# EAGLE board SparkX_smol_Dynamic_NFC_RFID_Tag-Panel (EAGLE 9.6.2), part 1 of 7
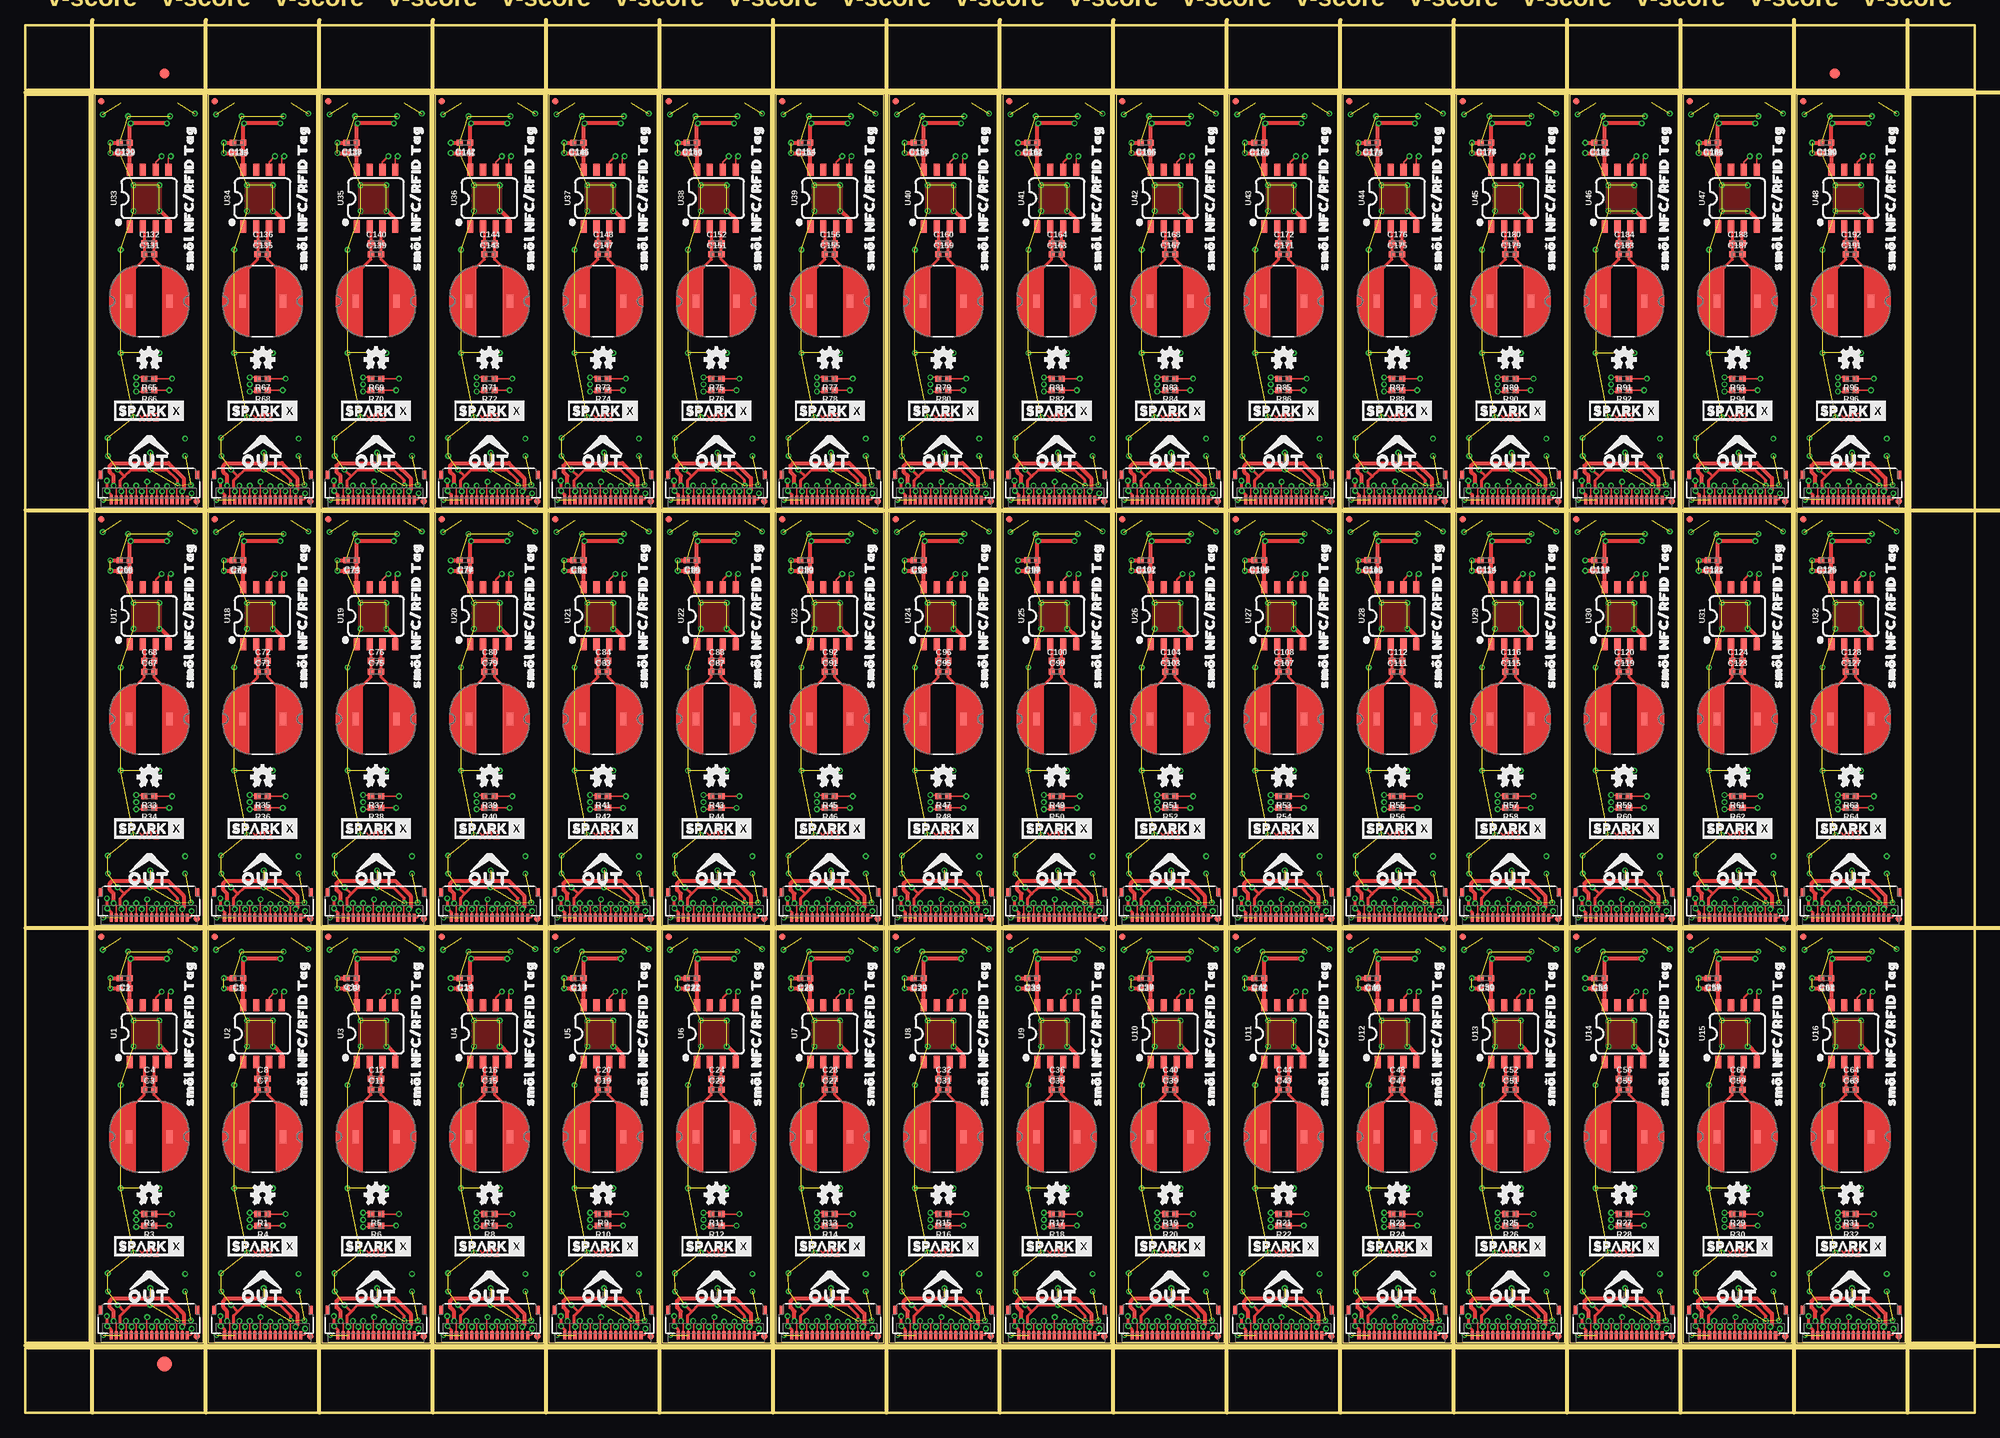
[diagram p0: board, top side]
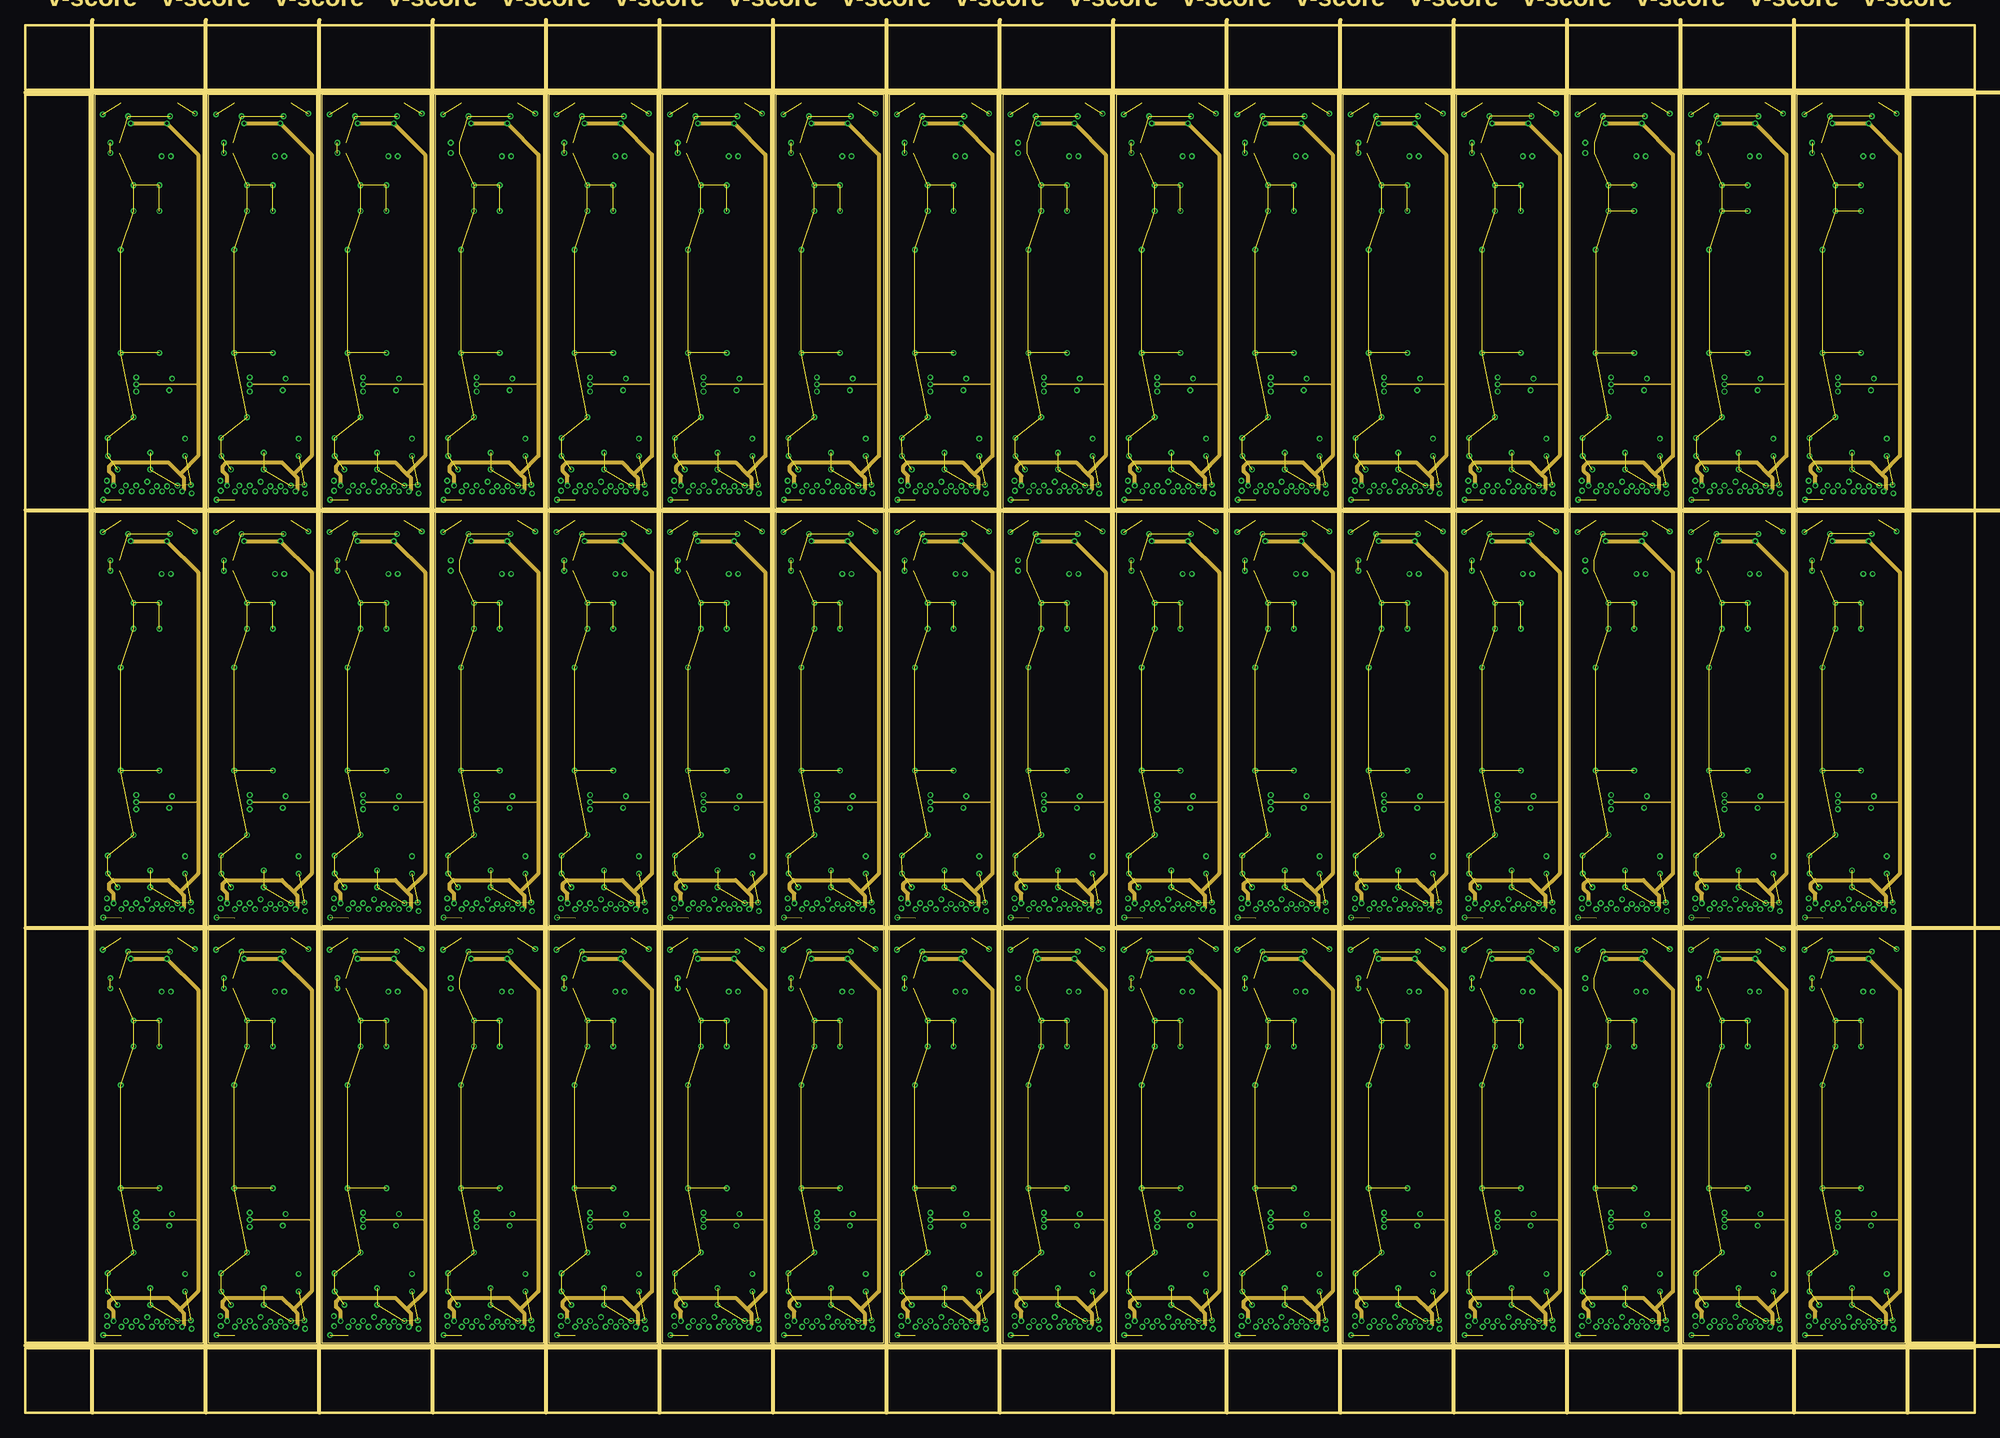
[diagram p1: board, inner layer Route2]
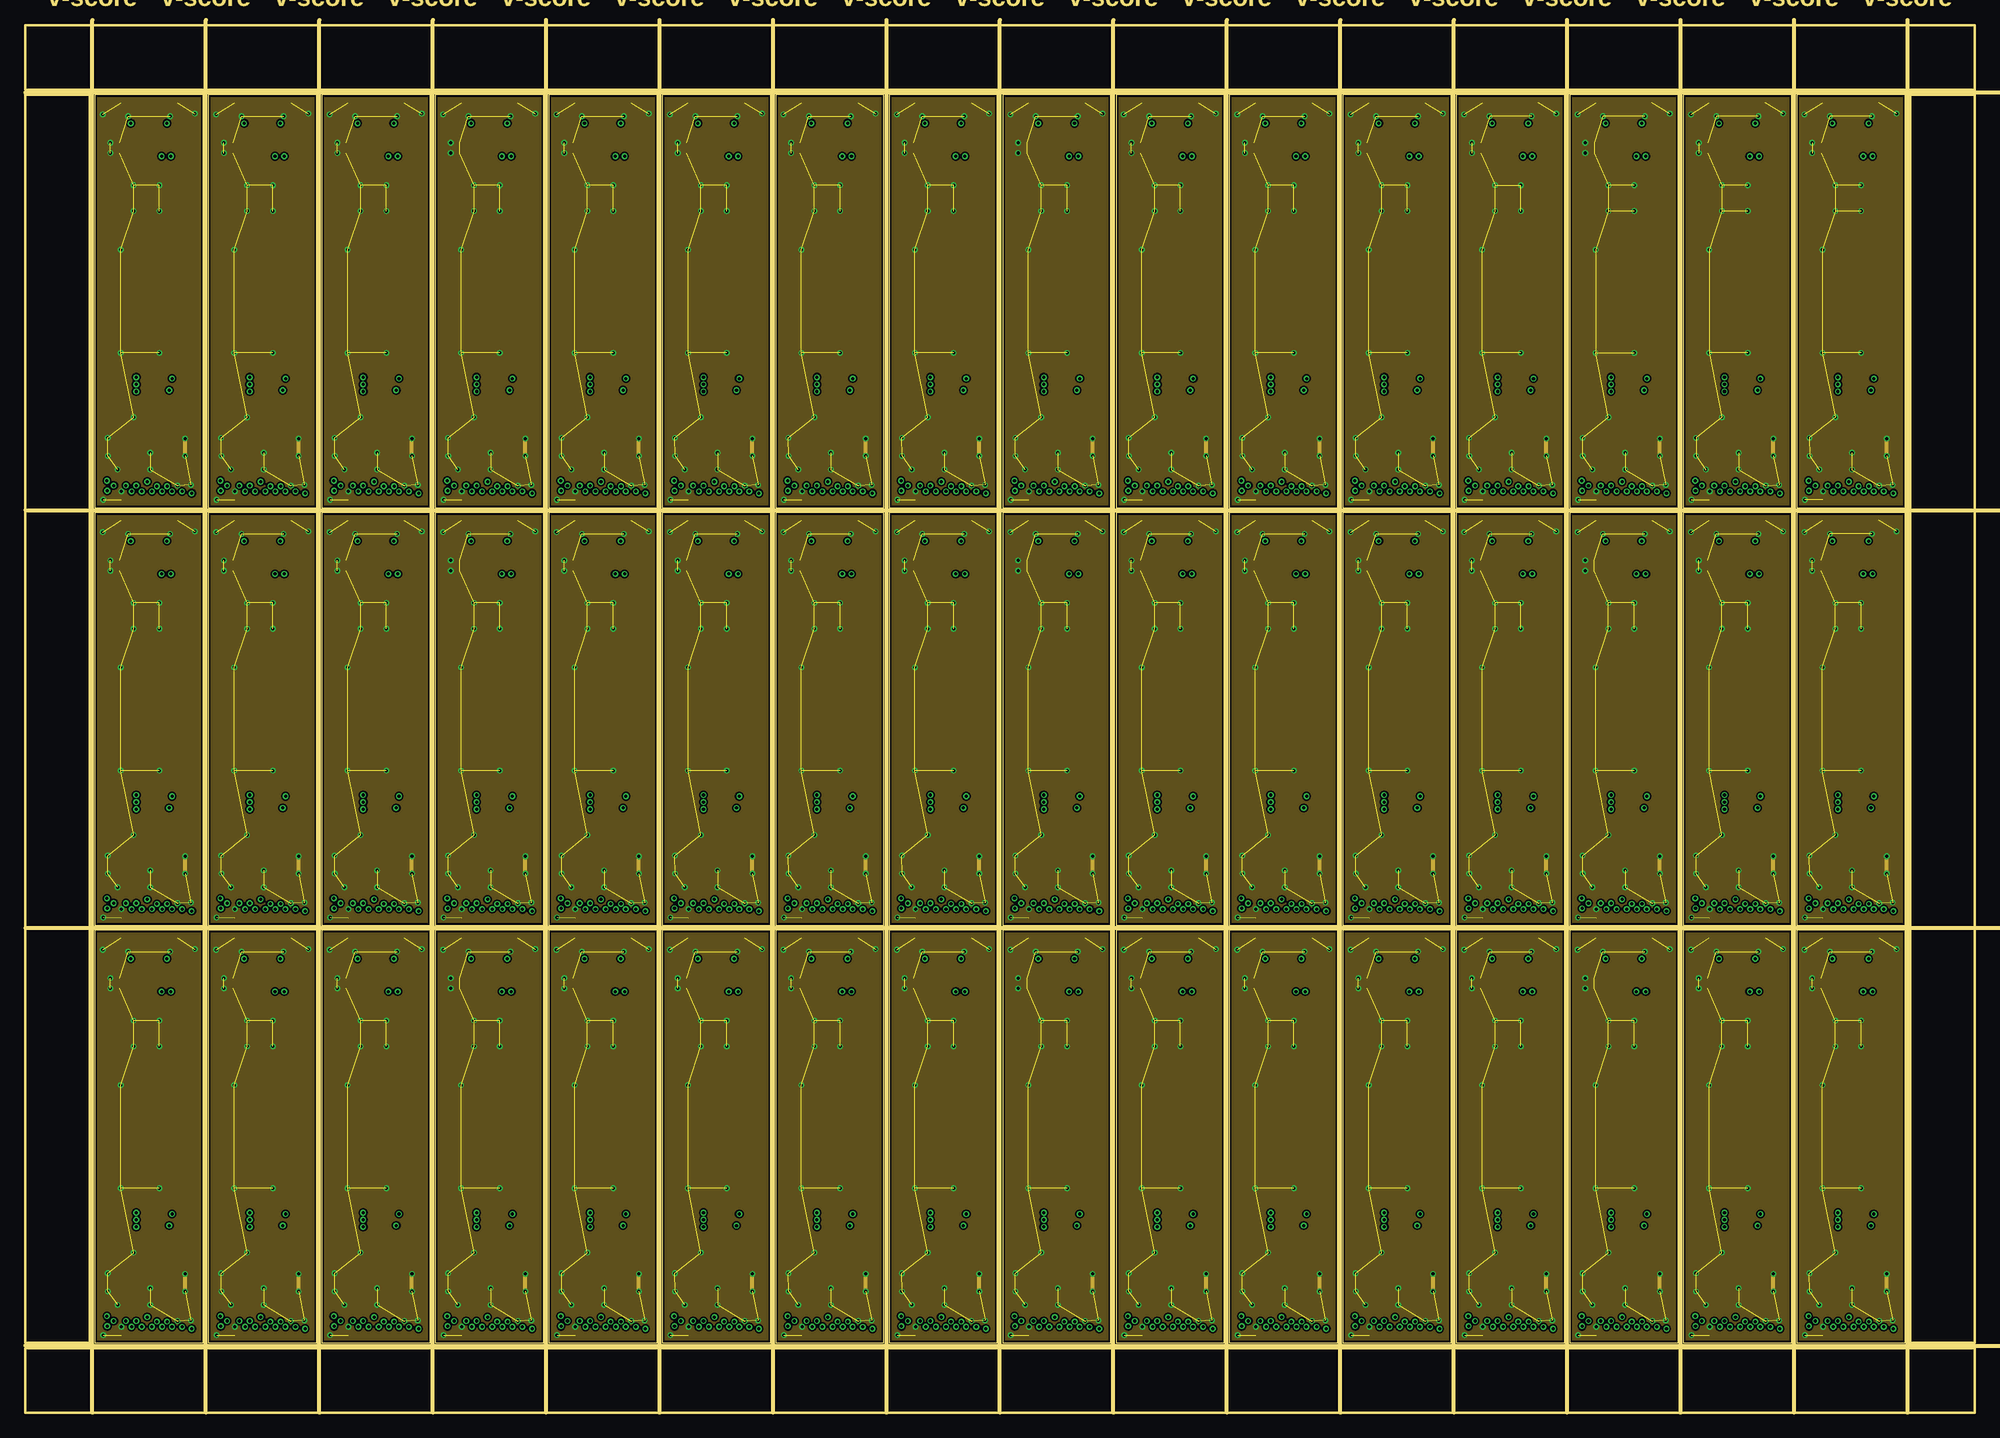
[diagram p2: board, inner layer Route15]
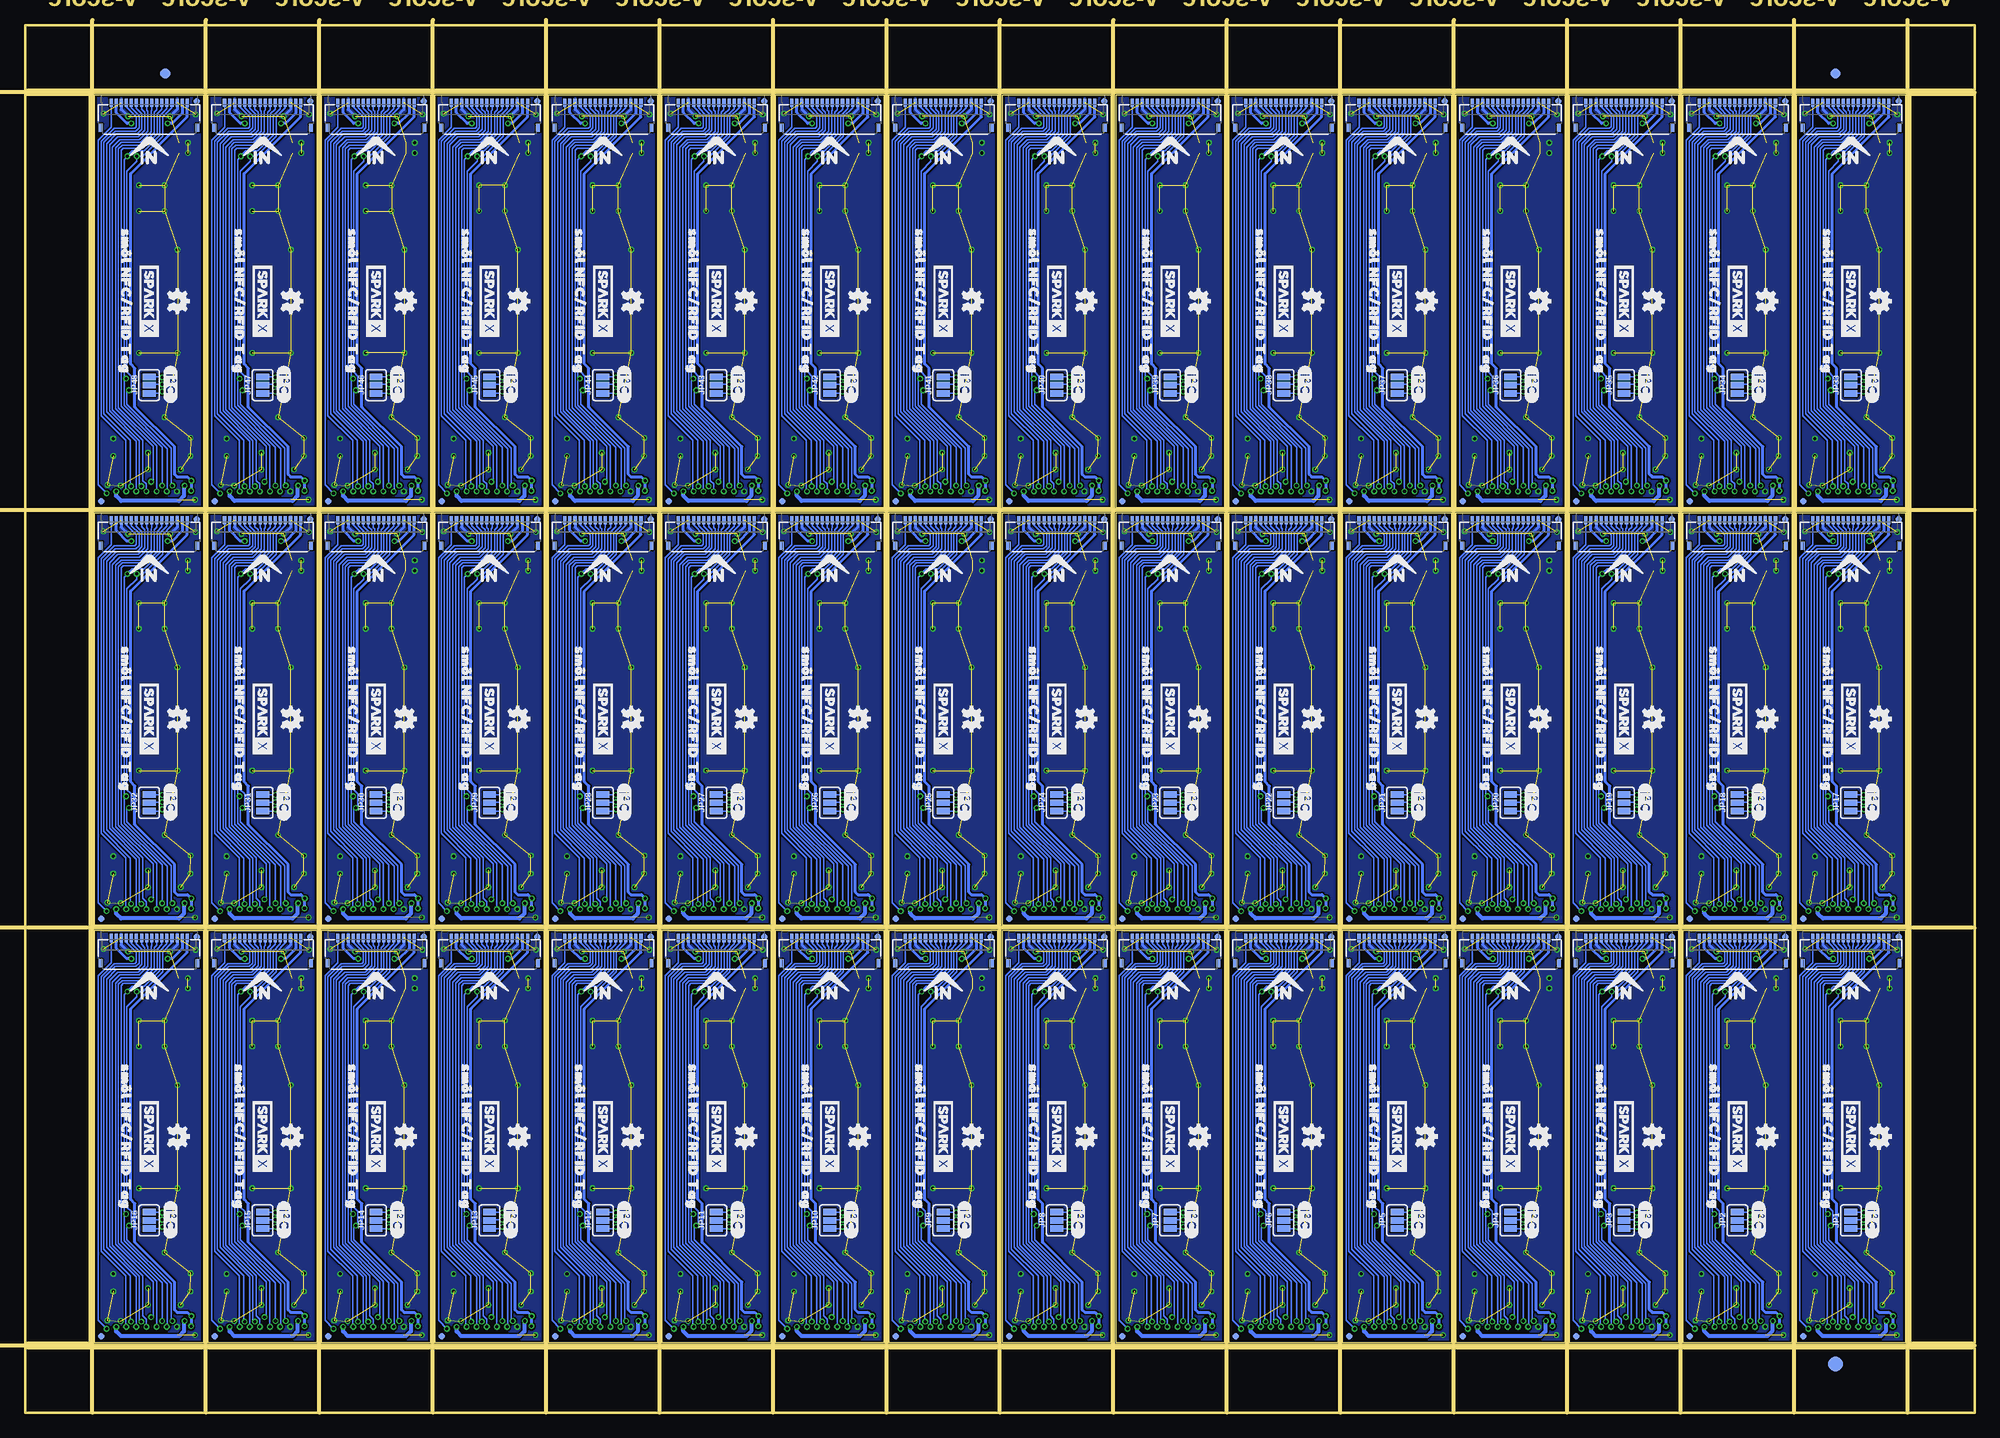
[diagram p3: board, bottom side, seen from below]

Size 192.02 x 136.65 mm. Coordinates in mm from the lower left corner, seen from the top.
Outline: 208 segments
Copper layers (1+2*15+16): Top 0.035559375mm / dielectric 0.47751875mm / Route2 0.035559375mm / dielectric 0.47751875mm / Route15 0.035559375mm / dielectric 0.47751875mm / Bottom 0.035559375mm
Design rules "SparkX_smol_Dynamic_NFC_RFID_Tag": minimum track width 5mil, minimum drill 0.2mm, track to track 5mil, track to pad 5mil, pad to pad 5mil, via to via 5mil, smd to smd 5mil, copper to edge 7mil, drill to drill 7mil, minimum pad ring 5mil, minimum via ring 5mil, stop-mask expansion 2.5mil, vias tented up to drill 25mil, thermal gap 10mil
Milling: 21 lines

## Footprints (pad centres in the part's own frame; a part is rotated, then mirrored left to right if it is on the bottom)
W3102 = smd 1.27 x 0.635: 1 0,2; 2 0,-2
0402-TIGHT = smd 0.6 x 0.6: 1 -0.5,0; 2 0.5,0
0402-TIGHT_NO_CREAM = smd 0.6 x 0.6: 1 -0.5,0; 2 0.5,0
FIDUCIAL-1X2 = smd 1 x 1: 1 0,0
FIDUCIAL-1.5X3 = smd 1.5 x 1.5: 1 0,0
FIDUCIAL-MICRO = smd 0.635 x 0.635: 1 0,0
FPC_16_0.5MM = smd 0.3 x 0.8: 1 -3.75,1.35; 2 -3.25,1.35; 3 -2.75,1.35; 4 -2.25,1.35; 5 -1.75,1.35; 6 -1.25,1.35; 7 -0.75,1.35; 8 -0.25,1.35; 9 0.25,1.35; 10 0.75,1.35; 11 1.25,1.35; 12 1.75,1.35; 13 2.25,1.35; 14 2.75,1.35; 15 3.25,1.35; 16 3.75,1.35 | smd 0.4 x 0.8: MP1 -4.75,-1.15; MP2 4.75,-1.15
SMT-JUMPER_3_NO_SILK = smd 0.635 x 1.27: 1 -0.813,0; 2 0,0; 3 0.813,0
SO08 = smd 0.6 x 1.2: 1 -1.905,-2.8; 2 -0.635,-2.8; 3 0.635,-2.8; 4 1.905,-2.8; 5 1.905,2.8; 6 0.635,2.8; 7 -0.635,2.8; 8 -1.905,2.8

## Placement (x,y rotation side)
ANT  4.7μH  [W3102]  12.19,27.18 90 top
ANT1  4.7μH  [W3102]  23.37,27.18 90 top
ANT2  4.7μH  [W3102]  34.54,27.18 90 top
ANT3  4.7μH  [W3102]  45.72,27.18 90 top
ANT4  4.7μH  [W3102]  56.9,27.18 90 top
ANT5  4.7μH  [W3102]  68.07,27.18 90 top
ANT6  4.7μH  [W3102]  79.25,27.18 90 top
ANT7  4.7μH  [W3102]  90.42,27.18 90 top
ANT8  4.7μH  [W3102]  101.6,27.18 90 top
ANT9  4.7μH  [W3102]  112.78,27.18 90 top
ANT10  4.7μH  [W3102]  123.95,27.18 90 top
ANT11  4.7μH  [W3102]  135.13,27.18 90 top
ANT12  4.7μH  [W3102]  146.3,27.18 90 top
ANT13  4.7μH  [W3102]  157.48,27.18 90 top
ANT14  4.7μH  [W3102]  168.66,27.18 90 top
ANT15  4.7μH  [W3102]  179.83,27.18 90 top
ANT16  4.7μH  [W3102]  12.19,68.33 90 top
ANT17  4.7μH  [W3102]  23.37,68.33 90 top
ANT18  4.7μH  [W3102]  34.54,68.33 90 top
ANT19  4.7μH  [W3102]  45.72,68.33 90 top
ANT20  4.7μH  [W3102]  56.9,68.33 90 top
ANT21  4.7μH  [W3102]  68.07,68.33 90 top
ANT22  4.7μH  [W3102]  79.25,68.33 90 top
ANT23  4.7μH  [W3102]  90.42,68.33 90 top
ANT24  4.7μH  [W3102]  101.6,68.33 90 top
ANT25  4.7μH  [W3102]  112.78,68.33 90 top
ANT26  4.7μH  [W3102]  123.95,68.33 90 top
ANT27  4.7μH  [W3102]  135.13,68.33 90 top
ANT28  4.7μH  [W3102]  146.3,68.33 90 top
ANT29  4.7μH  [W3102]  157.48,68.33 90 top
ANT30  4.7μH  [W3102]  168.66,68.33 90 top
ANT31  4.7μH  [W3102]  179.83,68.33 90 top
ANT32  4.7μH  [W3102]  12.19,109.47 90 top
ANT33  4.7μH  [W3102]  23.37,109.47 90 top
ANT34  4.7μH  [W3102]  34.54,109.47 90 top
ANT35  4.7μH  [W3102]  45.72,109.47 90 top
ANT36  4.7μH  [W3102]  56.9,109.47 90 top
ANT37  4.7μH  [W3102]  68.07,109.47 90 top
ANT38  4.7μH  [W3102]  79.25,109.47 90 top
ANT39  4.7μH  [W3102]  90.42,109.47 90 top
ANT40  4.7μH  [W3102]  101.6,109.47 90 top
ANT41  4.7μH  [W3102]  112.78,109.47 90 top
ANT42  4.7μH  [W3102]  123.95,109.47 90 top
ANT43  4.7μH  [W3102]  135.13,109.47 90 top
ANT44  4.7μH  [W3102]  146.3,109.47 90 top
ANT45  4.7μH  [W3102]  157.48,109.47 90 top
ANT46  4.7μH  [W3102]  168.66,109.47 90 top
ANT47  4.7μH  [W3102]  179.83,109.47 90 top
C1  0.1uF  [0402-TIGHT]  9.78,42.8 180 top
C2  2.2uF  [0402-TIGHT]  9.78,41.78 180 top
C3  DNP  [0402-TIGHT_NO_CREAM]  12.19,31.81 0 top
C4  0.5pF  [0402-TIGHT]  12.19,32.89 0 top
C5  2.2uF  [0402-TIGHT]  20.95,41.78 180 top
C6  0.1uF  [0402-TIGHT]  20.95,42.8 180 top
C7  DNP  [0402-TIGHT_NO_CREAM]  23.37,31.81 0 top
C8  0.5pF  [0402-TIGHT]  23.37,32.89 0 top
C9  2.2uF  [0402-TIGHT]  32.13,41.78 180 top
C10  0.1uF  [0402-TIGHT]  32.13,42.8 180 top
C11  DNP  [0402-TIGHT_NO_CREAM]  34.54,31.81 0 top
C12  0.5pF  [0402-TIGHT]  34.54,32.89 0 top
C13  2.2uF  [0402-TIGHT]  43.31,41.78 180 top
C14  0.1uF  [0402-TIGHT]  43.31,42.8 180 top
C15  DNP  [0402-TIGHT_NO_CREAM]  45.72,31.81 0 top
C16  0.5pF  [0402-TIGHT]  45.72,32.89 0 top
C17  2.2uF  [0402-TIGHT]  54.48,41.78 180 top
C18  0.1uF  [0402-TIGHT]  54.48,42.8 180 top
C19  DNP  [0402-TIGHT_NO_CREAM]  56.9,31.81 0 top
C20  0.5pF  [0402-TIGHT]  56.9,32.89 0 top
C21  2.2uF  [0402-TIGHT]  65.66,41.78 180 top
C22  0.1uF  [0402-TIGHT]  65.66,42.8 180 top
C23  DNP  [0402-TIGHT_NO_CREAM]  68.07,31.81 0 top
C24  0.5pF  [0402-TIGHT]  68.07,32.89 0 top
C25  2.2uF  [0402-TIGHT]  76.84,41.78 180 top
C26  0.1uF  [0402-TIGHT]  76.84,42.8 180 top
C27  DNP  [0402-TIGHT_NO_CREAM]  79.25,31.81 0 top
C28  0.5pF  [0402-TIGHT]  79.25,32.89 0 top
C29  2.2uF  [0402-TIGHT]  88.01,41.78 180 top
C30  0.1uF  [0402-TIGHT]  88.01,42.8 180 top
C31  DNP  [0402-TIGHT_NO_CREAM]  90.42,31.81 0 top
C32  0.5pF  [0402-TIGHT]  90.42,32.89 0 top
C33  2.2uF  [0402-TIGHT]  99.19,41.78 180 top
C34  0.1uF  [0402-TIGHT]  99.19,42.8 180 top
C35  DNP  [0402-TIGHT_NO_CREAM]  101.6,31.81 0 top
C36  0.5pF  [0402-TIGHT]  101.6,32.89 0 top
C37  2.2uF  [0402-TIGHT]  110.36,41.78 180 top
C38  0.1uF  [0402-TIGHT]  110.36,42.8 180 top
C39  DNP  [0402-TIGHT_NO_CREAM]  112.78,31.81 0 top
C40  0.5pF  [0402-TIGHT]  112.78,32.89 0 top
C41  2.2uF  [0402-TIGHT]  121.54,41.78 180 top
C42  0.1uF  [0402-TIGHT]  121.54,42.8 180 top
C43  DNP  [0402-TIGHT_NO_CREAM]  123.95,31.81 0 top
C44  0.5pF  [0402-TIGHT]  123.95,32.89 0 top
C45  2.2uF  [0402-TIGHT]  132.72,41.78 180 top
C46  0.1uF  [0402-TIGHT]  132.72,42.8 180 top
C47  DNP  [0402-TIGHT_NO_CREAM]  135.13,31.81 0 top
C48  0.5pF  [0402-TIGHT]  135.13,32.89 0 top
C49  2.2uF  [0402-TIGHT]  143.89,41.78 180 top
C50  0.1uF  [0402-TIGHT]  143.89,42.8 180 top
C51  DNP  [0402-TIGHT_NO_CREAM]  146.3,31.81 0 top
C52  0.5pF  [0402-TIGHT]  146.3,32.89 0 top
C53  2.2uF  [0402-TIGHT]  155.07,41.78 180 top
C54  0.1uF  [0402-TIGHT]  155.07,42.8 180 top
C55  DNP  [0402-TIGHT_NO_CREAM]  157.48,31.81 0 top
C56  0.5pF  [0402-TIGHT]  157.48,32.89 0 top
C57  2.2uF  [0402-TIGHT]  166.24,41.78 180 top
C58  0.1uF  [0402-TIGHT]  166.24,42.8 180 top
C59  DNP  [0402-TIGHT_NO_CREAM]  168.66,31.81 0 top
C60  0.5pF  [0402-TIGHT]  168.66,32.89 0 top
C61  2.2uF  [0402-TIGHT]  177.42,41.78 180 top
C62  0.1uF  [0402-TIGHT]  177.42,42.8 180 top
C63  DNP  [0402-TIGHT_NO_CREAM]  179.83,31.81 0 top
C64  0.5pF  [0402-TIGHT]  179.83,32.89 0 top
C65  2.2uF  [0402-TIGHT]  9.78,82.93 180 top
C66  0.1uF  [0402-TIGHT]  9.78,83.95 180 top
C67  DNP  [0402-TIGHT_NO_CREAM]  12.19,72.96 0 top
C68  0.5pF  [0402-TIGHT]  12.19,74.04 0 top
C69  2.2uF  [0402-TIGHT]  20.95,82.93 180 top
C70  0.1uF  [0402-TIGHT]  20.95,83.95 180 top
C71  DNP  [0402-TIGHT_NO_CREAM]  23.37,72.96 0 top
C72  0.5pF  [0402-TIGHT]  23.37,74.04 0 top
C73  2.2uF  [0402-TIGHT]  32.13,82.93 180 top
C74  0.1uF  [0402-TIGHT]  32.13,83.95 180 top
C75  DNP  [0402-TIGHT_NO_CREAM]  34.54,72.96 0 top
C76  0.5pF  [0402-TIGHT]  34.54,74.04 0 top
C77  2.2uF  [0402-TIGHT]  43.31,82.93 180 top
C78  0.1uF  [0402-TIGHT]  43.31,83.95 180 top
C79  DNP  [0402-TIGHT_NO_CREAM]  45.72,72.96 0 top
C80  0.5pF  [0402-TIGHT]  45.72,74.04 0 top
C81  2.2uF  [0402-TIGHT]  54.48,82.93 180 top
C82  0.1uF  [0402-TIGHT]  54.48,83.95 180 top
C83  DNP  [0402-TIGHT_NO_CREAM]  56.9,72.96 0 top
C84  0.5pF  [0402-TIGHT]  56.9,74.04 0 top
C85  2.2uF  [0402-TIGHT]  65.66,82.93 180 top
C86  0.1uF  [0402-TIGHT]  65.66,83.95 180 top
C87  DNP  [0402-TIGHT_NO_CREAM]  68.07,72.96 0 top
C88  0.5pF  [0402-TIGHT]  68.07,74.04 0 top
C89  2.2uF  [0402-TIGHT]  76.84,82.93 180 top
C90  0.1uF  [0402-TIGHT]  76.84,83.95 180 top
C91  DNP  [0402-TIGHT_NO_CREAM]  79.25,72.96 0 top
C92  0.5pF  [0402-TIGHT]  79.25,74.04 0 top
C93  2.2uF  [0402-TIGHT]  88.01,82.93 180 top
C94  0.1uF  [0402-TIGHT]  88.01,83.95 180 top
C95  DNP  [0402-TIGHT_NO_CREAM]  90.42,72.96 0 top
C96  0.5pF  [0402-TIGHT]  90.42,74.04 0 top
C97  2.2uF  [0402-TIGHT]  99.19,82.93 180 top
C98  0.1uF  [0402-TIGHT]  99.19,83.95 180 top
C99  DNP  [0402-TIGHT_NO_CREAM]  101.6,72.96 0 top
C100  0.5pF  [0402-TIGHT]  101.6,74.04 0 top
C101  2.2uF  [0402-TIGHT]  110.36,82.93 180 top
C102  0.1uF  [0402-TIGHT]  110.36,83.95 180 top
C103  DNP  [0402-TIGHT_NO_CREAM]  112.78,72.96 0 top
C104  0.5pF  [0402-TIGHT]  112.78,74.04 0 top
C105  2.2uF  [0402-TIGHT]  121.54,82.93 180 top
C106  0.1uF  [0402-TIGHT]  121.54,83.95 180 top
C107  DNP  [0402-TIGHT_NO_CREAM]  123.95,72.96 0 top
C108  0.5pF  [0402-TIGHT]  123.95,74.04 0 top
C109  2.2uF  [0402-TIGHT]  132.72,82.93 180 top
C110  0.1uF  [0402-TIGHT]  132.72,83.95 180 top
C111  DNP  [0402-TIGHT_NO_CREAM]  135.13,72.96 0 top
C112  0.5pF  [0402-TIGHT]  135.13,74.04 0 top
C113  2.2uF  [0402-TIGHT]  143.89,82.93 180 top
C114  0.1uF  [0402-TIGHT]  143.89,83.95 180 top
C115  DNP  [0402-TIGHT_NO_CREAM]  146.3,72.96 0 top
C116  0.5pF  [0402-TIGHT]  146.3,74.04 0 top
C117  2.2uF  [0402-TIGHT]  155.07,82.93 180 top
C118  0.1uF  [0402-TIGHT]  155.07,83.95 180 top
C119  DNP  [0402-TIGHT_NO_CREAM]  157.48,72.96 0 top
C120  0.5pF  [0402-TIGHT]  157.48,74.04 0 top
C121  2.2uF  [0402-TIGHT]  166.24,82.93 180 top
C122  0.1uF  [0402-TIGHT]  166.24,83.95 180 top
C123  DNP  [0402-TIGHT_NO_CREAM]  168.66,72.96 0 top
C124  0.5pF  [0402-TIGHT]  168.66,74.04 0 top
C125  2.2uF  [0402-TIGHT]  177.42,82.93 180 top
C126  0.1uF  [0402-TIGHT]  177.42,83.95 180 top
C127  DNP  [0402-TIGHT_NO_CREAM]  179.83,72.96 0 top
C128  0.5pF  [0402-TIGHT]  179.83,74.04 0 top
C129  2.2uF  [0402-TIGHT]  9.78,124.08 180 top
C130  0.1uF  [0402-TIGHT]  9.78,125.09 180 top
C131  DNP  [0402-TIGHT_NO_CREAM]  12.19,114.11 0 top
C132  0.5pF  [0402-TIGHT]  12.19,115.19 0 top
C133  2.2uF  [0402-TIGHT]  20.95,124.08 180 top
C134  0.1uF  [0402-TIGHT]  20.95,125.09 180 top
C135  DNP  [0402-TIGHT_NO_CREAM]  23.37,114.11 0 top
C136  0.5pF  [0402-TIGHT]  23.37,115.19 0 top
C137  2.2uF  [0402-TIGHT]  32.13,124.08 180 top
C138  0.1uF  [0402-TIGHT]  32.13,125.09 180 top
C139  DNP  [0402-TIGHT_NO_CREAM]  34.54,114.11 0 top
C140  0.5pF  [0402-TIGHT]  34.54,115.19 0 top
C141  2.2uF  [0402-TIGHT]  43.31,124.08 180 top
C142  0.1uF  [0402-TIGHT]  43.31,125.09 180 top
C143  DNP  [0402-TIGHT_NO_CREAM]  45.72,114.11 0 top
C144  0.5pF  [0402-TIGHT]  45.72,115.19 0 top
C145  2.2uF  [0402-TIGHT]  54.48,124.08 180 top
C146  0.1uF  [0402-TIGHT]  54.48,125.09 180 top
C147  DNP  [0402-TIGHT_NO_CREAM]  56.9,114.11 0 top
C148  0.5pF  [0402-TIGHT]  56.9,115.19 0 top
C149  2.2uF  [0402-TIGHT]  65.66,124.08 180 top
C150  0.1uF  [0402-TIGHT]  65.66,125.09 180 top
C151  DNP  [0402-TIGHT_NO_CREAM]  68.07,114.11 0 top
C152  0.5pF  [0402-TIGHT]  68.07,115.19 0 top
C153  2.2uF  [0402-TIGHT]  76.84,124.08 180 top
C154  0.1uF  [0402-TIGHT]  76.84,125.09 180 top
C155  DNP  [0402-TIGHT_NO_CREAM]  79.25,114.11 0 top
C156  0.5pF  [0402-TIGHT]  79.25,115.19 0 top
C157  2.2uF  [0402-TIGHT]  88.01,124.08 180 top
C158  0.1uF  [0402-TIGHT]  88.01,125.09 180 top
C159  DNP  [0402-TIGHT_NO_CREAM]  90.42,114.11 0 top
C160  0.5pF  [0402-TIGHT]  90.42,115.19 0 top
C161  2.2uF  [0402-TIGHT]  99.19,124.08 180 top
C162  0.1uF  [0402-TIGHT]  99.19,125.09 180 top
C163  DNP  [0402-TIGHT_NO_CREAM]  101.6,114.11 0 top
C164  0.5pF  [0402-TIGHT]  101.6,115.19 0 top
C165  2.2uF  [0402-TIGHT]  110.36,124.08 180 top
C166  0.1uF  [0402-TIGHT]  110.36,125.09 180 top
C167  DNP  [0402-TIGHT_NO_CREAM]  112.78,114.11 0 top
C168  0.5pF  [0402-TIGHT]  112.78,115.19 0 top
C169  2.2uF  [0402-TIGHT]  121.54,124.08 180 top
C170  0.1uF  [0402-TIGHT]  121.54,125.09 180 top
C171  DNP  [0402-TIGHT_NO_CREAM]  123.95,114.11 0 top
C172  0.5pF  [0402-TIGHT]  123.95,115.19 0 top
C173  2.2uF  [0402-TIGHT]  132.72,124.08 180 top
C174  0.1uF  [0402-TIGHT]  132.72,125.09 180 top
C175  DNP  [0402-TIGHT_NO_CREAM]  135.13,114.11 0 top
C176  0.5pF  [0402-TIGHT]  135.13,115.19 0 top
C177  2.2uF  [0402-TIGHT]  143.89,124.08 180 top
C178  0.1uF  [0402-TIGHT]  143.89,125.09 180 top
C179  DNP  [0402-TIGHT_NO_CREAM]  146.3,114.11 0 top
C180  0.5pF  [0402-TIGHT]  146.3,115.19 0 top
C181  2.2uF  [0402-TIGHT]  155.07,124.08 180 top
C182  0.1uF  [0402-TIGHT]  155.07,125.09 180 top
C183  DNP  [0402-TIGHT_NO_CREAM]  157.48,114.11 0 top
C184  0.5pF  [0402-TIGHT]  157.48,115.19 0 top
C185  2.2uF  [0402-TIGHT]  166.24,124.08 180 top
C186  0.1uF  [0402-TIGHT]  166.24,125.09 180 top
C187  DNP  [0402-TIGHT_NO_CREAM]  168.66,114.11 0 top
C188  0.5pF  [0402-TIGHT]  168.66,115.19 0 top
C189  2.2uF  [0402-TIGHT]  177.42,124.08 180 top
C190  0.1uF  [0402-TIGHT]  177.42,125.09 180 top
C191  DNP  [0402-TIGHT_NO_CREAM]  179.83,114.11 0 top
C192  0.5pF  [0402-TIGHT]  179.83,115.19 0 top
E$1  [FIDUCIAL-1X2]  13.72,131.89 0 top
E$2  [FIDUCIAL-1X2]  13.72,131.89 0 bottom
E$3  [FIDUCIAL-1X2]  178.24,131.89 0 top
E$4  [FIDUCIAL-1X2]  178.24,131.89 0 bottom
E$5  [FIDUCIAL-1.5X3]  13.72,4.76 0 top
E$6  [FIDUCIAL-1.5X3]  13.72,4.76 0 bottom
FD1  FIDUCIALUFIDUCIAL  [FIDUCIAL-MICRO]  7.49,46.86 0 top
FD2  FIDUCIALUFIDUCIAL  [FIDUCIAL-MICRO]  7.49,46.86 0 bottom
FD3  FIDUCIALUFIDUCIAL  [FIDUCIAL-MICRO]  16.89,7.49 0 top
FD4  FIDUCIALUFIDUCIAL  [FIDUCIAL-MICRO]  16.89,7.49 0 bottom
FD5  FIDUCIALUFIDUCIAL  [FIDUCIAL-MICRO]  18.67,46.86 0 top
FD6  FIDUCIALUFIDUCIAL  [FIDUCIAL-MICRO]  18.67,46.86 0 bottom
FD7  FIDUCIALUFIDUCIAL  [FIDUCIAL-MICRO]  28.07,7.49 0 top
FD8  FIDUCIALUFIDUCIAL  [FIDUCIAL-MICRO]  28.07,7.49 0 bottom
FD9  FIDUCIALUFIDUCIAL  [FIDUCIAL-MICRO]  29.84,46.86 0 top
FD10  FIDUCIALUFIDUCIAL  [FIDUCIAL-MICRO]  29.84,46.86 0 bottom
FD11  FIDUCIALUFIDUCIAL  [FIDUCIAL-MICRO]  39.24,7.49 0 top
FD12  FIDUCIALUFIDUCIAL  [FIDUCIAL-MICRO]  39.24,7.49 0 bottom
FD13  FIDUCIALUFIDUCIAL  [FIDUCIAL-MICRO]  41.02,46.86 0 top
FD14  FIDUCIALUFIDUCIAL  [FIDUCIAL-MICRO]  41.02,46.86 0 bottom
FD15  FIDUCIALUFIDUCIAL  [FIDUCIAL-MICRO]  50.42,7.49 0 top
FD16  FIDUCIALUFIDUCIAL  [FIDUCIAL-MICRO]  50.42,7.49 0 bottom
FD17  FIDUCIALUFIDUCIAL  [FIDUCIAL-MICRO]  52.2,46.86 0 top
FD18  FIDUCIALUFIDUCIAL  [FIDUCIAL-MICRO]  52.2,46.86 0 bottom
FD19  FIDUCIALUFIDUCIAL  [FIDUCIAL-MICRO]  61.59,7.49 0 top
FD20  FIDUCIALUFIDUCIAL  [FIDUCIAL-MICRO]  61.59,7.49 0 bottom
FD21  FIDUCIALUFIDUCIAL  [FIDUCIAL-MICRO]  63.37,46.86 0 top
FD22  FIDUCIALUFIDUCIAL  [FIDUCIAL-MICRO]  63.37,46.86 0 bottom
FD23  FIDUCIALUFIDUCIAL  [FIDUCIAL-MICRO]  72.77,7.49 0 top
FD24  FIDUCIALUFIDUCIAL  [FIDUCIAL-MICRO]  72.77,7.49 0 bottom
FD25  FIDUCIALUFIDUCIAL  [FIDUCIAL-MICRO]  74.55,46.86 0 top
FD26  FIDUCIALUFIDUCIAL  [FIDUCIAL-MICRO]  74.55,46.86 0 bottom
FD27  FIDUCIALUFIDUCIAL  [FIDUCIAL-MICRO]  83.95,7.49 0 top
FD28  FIDUCIALUFIDUCIAL  [FIDUCIAL-MICRO]  83.95,7.49 0 bottom
FD29  FIDUCIALUFIDUCIAL  [FIDUCIAL-MICRO]  85.73,46.86 0 top
FD30  FIDUCIALUFIDUCIAL  [FIDUCIAL-MICRO]  85.73,46.86 0 bottom
FD31  FIDUCIALUFIDUCIAL  [FIDUCIAL-MICRO]  95.12,7.49 0 top
FD32  FIDUCIALUFIDUCIAL  [FIDUCIAL-MICRO]  95.12,7.49 0 bottom
FD33  FIDUCIALUFIDUCIAL  [FIDUCIAL-MICRO]  96.9,46.86 0 top
FD34  FIDUCIALUFIDUCIAL  [FIDUCIAL-MICRO]  96.9,46.86 0 bottom
FD35  FIDUCIALUFIDUCIAL  [FIDUCIAL-MICRO]  106.3,7.49 0 top
FD36  FIDUCIALUFIDUCIAL  [FIDUCIAL-MICRO]  106.3,7.49 0 bottom
FD37  FIDUCIALUFIDUCIAL  [FIDUCIAL-MICRO]  108.08,46.86 0 top
FD38  FIDUCIALUFIDUCIAL  [FIDUCIAL-MICRO]  108.08,46.86 0 bottom
FD39  FIDUCIALUFIDUCIAL  [FIDUCIAL-MICRO]  117.48,7.49 0 top
FD40  FIDUCIALUFIDUCIAL  [FIDUCIAL-MICRO]  117.48,7.49 0 bottom
FD41  FIDUCIALUFIDUCIAL  [FIDUCIAL-MICRO]  119.25,46.86 0 top
FD42  FIDUCIALUFIDUCIAL  [FIDUCIAL-MICRO]  119.25,46.86 0 bottom
FD43  FIDUCIALUFIDUCIAL  [FIDUCIAL-MICRO]  128.65,7.49 0 top
FD44  FIDUCIALUFIDUCIAL  [FIDUCIAL-MICRO]  128.65,7.49 0 bottom
FD45  FIDUCIALUFIDUCIAL  [FIDUCIAL-MICRO]  130.43,46.86 0 top
FD46  FIDUCIALUFIDUCIAL  [FIDUCIAL-MICRO]  130.43,46.86 0 bottom
FD47  FIDUCIALUFIDUCIAL  [FIDUCIAL-MICRO]  139.83,7.49 0 top
FD48  FIDUCIALUFIDUCIAL  [FIDUCIAL-MICRO]  139.83,7.49 0 bottom
FD49  FIDUCIALUFIDUCIAL  [FIDUCIAL-MICRO]  141.61,46.86 0 top
FD50  FIDUCIALUFIDUCIAL  [FIDUCIAL-MICRO]  141.61,46.86 0 bottom
FD51  FIDUCIALUFIDUCIAL  [FIDUCIAL-MICRO]  151,7.49 0 top
FD52  FIDUCIALUFIDUCIAL  [FIDUCIAL-MICRO]  151,7.49 0 bottom
FD53  FIDUCIALUFIDUCIAL  [FIDUCIAL-MICRO]  152.78,46.86 0 top
FD54  FIDUCIALUFIDUCIAL  [FIDUCIAL-MICRO]  152.78,46.86 0 bottom
FD55  FIDUCIALUFIDUCIAL  [FIDUCIAL-MICRO]  162.18,7.49 0 top
FD56  FIDUCIALUFIDUCIAL  [FIDUCIAL-MICRO]  162.18,7.49 0 bottom
FD57  FIDUCIALUFIDUCIAL  [FIDUCIAL-MICRO]  163.96,46.86 0 top
FD58  FIDUCIALUFIDUCIAL  [FIDUCIAL-MICRO]  163.96,46.86 0 bottom
FD59  FIDUCIALUFIDUCIAL  [FIDUCIAL-MICRO]  173.36,7.49 0 top
FD60  FIDUCIALUFIDUCIAL  [FIDUCIAL-MICRO]  173.36,7.49 0 bottom
FD61  FIDUCIALUFIDUCIAL  [FIDUCIAL-MICRO]  175.13,46.86 0 top
FD62  FIDUCIALUFIDUCIAL  [FIDUCIAL-MICRO]  175.13,46.86 0 bottom
FD63  FIDUCIALUFIDUCIAL  [FIDUCIAL-MICRO]  184.53,7.49 0 top
FD64  FIDUCIALUFIDUCIAL  [FIDUCIAL-MICRO]  184.53,7.49 0 bottom
FD65  FIDUCIALUFIDUCIAL  [FIDUCIAL-MICRO]  7.49,88.01 0 top
FD66  FIDUCIALUFIDUCIAL  [FIDUCIAL-MICRO]  7.49,88.01 0 bottom
FD67  FIDUCIALUFIDUCIAL  [FIDUCIAL-MICRO]  16.89,48.64 0 top
FD68  FIDUCIALUFIDUCIAL  [FIDUCIAL-MICRO]  16.89,48.64 0 bottom
FD69  FIDUCIALUFIDUCIAL  [FIDUCIAL-MICRO]  18.67,88.01 0 top
FD70  FIDUCIALUFIDUCIAL  [FIDUCIAL-MICRO]  18.67,88.01 0 bottom
FD71  FIDUCIALUFIDUCIAL  [FIDUCIAL-MICRO]  28.07,48.64 0 top
FD72  FIDUCIALUFIDUCIAL  [FIDUCIAL-MICRO]  28.07,48.64 0 bottom
FD73  FIDUCIALUFIDUCIAL  [FIDUCIAL-MICRO]  29.84,88.01 0 top
FD74  FIDUCIALUFIDUCIAL  [FIDUCIAL-MICRO]  29.84,88.01 0 bottom
FD75  FIDUCIALUFIDUCIAL  [FIDUCIAL-MICRO]  39.24,48.64 0 top
FD76  FIDUCIALUFIDUCIAL  [FIDUCIAL-MICRO]  39.24,48.64 0 bottom
FD77  FIDUCIALUFIDUCIAL  [FIDUCIAL-MICRO]  41.02,88.01 0 top
FD78  FIDUCIALUFIDUCIAL  [FIDUCIAL-MICRO]  41.02,88.01 0 bottom
FD79  FIDUCIALUFIDUCIAL  [FIDUCIAL-MICRO]  50.42,48.64 0 top
FD80  FIDUCIALUFIDUCIAL  [FIDUCIAL-MICRO]  50.42,48.64 0 bottom
FD81  FIDUCIALUFIDUCIAL  [FIDUCIAL-MICRO]  52.2,88.01 0 top
FD82  FIDUCIALUFIDUCIAL  [FIDUCIAL-MICRO]  52.2,88.01 0 bottom
FD83  FIDUCIALUFIDUCIAL  [FIDUCIAL-MICRO]  61.59,48.64 0 top
FD84  FIDUCIALUFIDUCIAL  [FIDUCIAL-MICRO]  61.59,48.64 0 bottom
FD85  FIDUCIALUFIDUCIAL  [FIDUCIAL-MICRO]  63.37,88.01 0 top
FD86  FIDUCIALUFIDUCIAL  [FIDUCIAL-MICRO]  63.37,88.01 0 bottom
FD87  FIDUCIALUFIDUCIAL  [FIDUCIAL-MICRO]  72.77,48.64 0 top
FD88  FIDUCIALUFIDUCIAL  [FIDUCIAL-MICRO]  72.77,48.64 0 bottom
FD89  FIDUCIALUFIDUCIAL  [FIDUCIAL-MICRO]  74.55,88.01 0 top
FD90  FIDUCIALUFIDUCIAL  [FIDUCIAL-MICRO]  74.55,88.01 0 bottom
FD91  FIDUCIALUFIDUCIAL  [FIDUCIAL-MICRO]  83.95,48.64 0 top
FD92  FIDUCIALUFIDUCIAL  [FIDUCIAL-MICRO]  83.95,48.64 0 bottom
FD93  FIDUCIALUFIDUCIAL  [FIDUCIAL-MICRO]  85.73,88.01 0 top
FD94  FIDUCIALUFIDUCIAL  [FIDUCIAL-MICRO]  85.73,88.01 0 bottom
FD95  FIDUCIALUFIDUCIAL  [FIDUCIAL-MICRO]  95.12,48.64 0 top
FD96  FIDUCIALUFIDUCIAL  [FIDUCIAL-MICRO]  95.12,48.64 0 bottom
FD97  FIDUCIALUFIDUCIAL  [FIDUCIAL-MICRO]  96.9,88.01 0 top
FD98  FIDUCIALUFIDUCIAL  [FIDUCIAL-MICRO]  96.9,88.01 0 bottom
FD99  FIDUCIALUFIDUCIAL  [FIDUCIAL-MICRO]  106.3,48.64 0 top
FD100  FIDUCIALUFIDUCIAL  [FIDUCIAL-MICRO]  106.3,48.64 0 bottom
FD101  FIDUCIALUFIDUCIAL  [FIDUCIAL-MICRO]  108.08,88.01 0 top
FD102  FIDUCIALUFIDUCIAL  [FIDUCIAL-MICRO]  108.08,88.01 0 bottom
FD103  FIDUCIALUFIDUCIAL  [FIDUCIAL-MICRO]  117.48,48.64 0 top
FD104  FIDUCIALUFIDUCIAL  [FIDUCIAL-MICRO]  117.48,48.64 0 bottom
FD105  FIDUCIALUFIDUCIAL  [FIDUCIAL-MICRO]  119.25,88.01 0 top
FD106  FIDUCIALUFIDUCIAL  [FIDUCIAL-MICRO]  119.25,88.01 0 bottom
FD107  FIDUCIALUFIDUCIAL  [FIDUCIAL-MICRO]  128.65,48.64 0 top
FD108  FIDUCIALUFIDUCIAL  [FIDUCIAL-MICRO]  128.65,48.64 0 bottom
FD109  FIDUCIALUFIDUCIAL  [FIDUCIAL-MICRO]  130.43,88.01 0 top
FD110  FIDUCIALUFIDUCIAL  [FIDUCIAL-MICRO]  130.43,88.01 0 bottom
FD111  FIDUCIALUFIDUCIAL  [FIDUCIAL-MICRO]  139.83,48.64 0 top
FD112  FIDUCIALUFIDUCIAL  [FIDUCIAL-MICRO]  139.83,48.64 0 bottom
FD113  FIDUCIALUFIDUCIAL  [FIDUCIAL-MICRO]  141.61,88.01 0 top
FD114  FIDUCIALUFIDUCIAL  [FIDUCIAL-MICRO]  141.61,88.01 0 bottom
FD115  FIDUCIALUFIDUCIAL  [FIDUCIAL-MICRO]  151,48.64 0 top
FD116  FIDUCIALUFIDUCIAL  [FIDUCIAL-MICRO]  151,48.64 0 bottom
FD117  FIDUCIALUFIDUCIAL  [FIDUCIAL-MICRO]  152.78,88.01 0 top
FD118  FIDUCIALUFIDUCIAL  [FIDUCIAL-MICRO]  152.78,88.01 0 bottom
FD119  FIDUCIALUFIDUCIAL  [FIDUCIAL-MICRO]  162.18,48.64 0 top
FD120  FIDUCIALUFIDUCIAL  [FIDUCIAL-MICRO]  162.18,48.64 0 bottom
FD121  FIDUCIALUFIDUCIAL  [FIDUCIAL-MICRO]  163.96,88.01 0 top
FD122  FIDUCIALUFIDUCIAL  [FIDUCIAL-MICRO]  163.96,88.01 0 bottom
FD123  FIDUCIALUFIDUCIAL  [FIDUCIAL-MICRO]  173.36,48.64 0 top
FD124  FIDUCIALUFIDUCIAL  [FIDUCIAL-MICRO]  173.36,48.64 0 bottom
FD125  FIDUCIALUFIDUCIAL  [FIDUCIAL-MICRO]  175.13,88.01 0 top
FD126  FIDUCIALUFIDUCIAL  [FIDUCIAL-MICRO]  175.13,88.01 0 bottom
FD127  FIDUCIALUFIDUCIAL  [FIDUCIAL-MICRO]  184.53,48.64 0 top
FD128  FIDUCIALUFIDUCIAL  [FIDUCIAL-MICRO]  184.53,48.64 0 bottom
FD129  FIDUCIALUFIDUCIAL  [FIDUCIAL-MICRO]  7.49,129.16 0 top
FD130  FIDUCIALUFIDUCIAL  [FIDUCIAL-MICRO]  7.49,129.16 0 bottom
FD131  FIDUCIALUFIDUCIAL  [FIDUCIAL-MICRO]  16.89,89.79 0 top
FD132  FIDUCIALUFIDUCIAL  [FIDUCIAL-MICRO]  16.89,89.79 0 bottom
FD133  FIDUCIALUFIDUCIAL  [FIDUCIAL-MICRO]  18.67,129.16 0 top
FD134  FIDUCIALUFIDUCIAL  [FIDUCIAL-MICRO]  18.67,129.16 0 bottom
FD135  FIDUCIALUFIDUCIAL  [FIDUCIAL-MICRO]  28.07,89.79 0 top
FD136  FIDUCIALUFIDUCIAL  [FIDUCIAL-MICRO]  28.07,89.79 0 bottom
FD137  FIDUCIALUFIDUCIAL  [FIDUCIAL-MICRO]  29.84,129.16 0 top
FD138  FIDUCIALUFIDUCIAL  [FIDUCIAL-MICRO]  29.84,129.16 0 bottom
FD139  FIDUCIALUFIDUCIAL  [FIDUCIAL-MICRO]  39.24,89.79 0 top
FD140  FIDUCIALUFIDUCIAL  [FIDUCIAL-MICRO]  39.24,89.79 0 bottom
FD141  FIDUCIALUFIDUCIAL  [FIDUCIAL-MICRO]  41.02,129.16 0 top
FD142  FIDUCIALUFIDUCIAL  [FIDUCIAL-MICRO]  41.02,129.16 0 bottom
FD143  FIDUCIALUFIDUCIAL  [FIDUCIAL-MICRO]  50.42,89.79 0 top
FD144  FIDUCIALUFIDUCIAL  [FIDUCIAL-MICRO]  50.42,89.79 0 bottom
FD145  FIDUCIALUFIDUCIAL  [FIDUCIAL-MICRO]  52.2,129.16 0 top
FD146  FIDUCIALUFIDUCIAL  [FIDUCIAL-MICRO]  52.2,129.16 0 bottom
FD147  FIDUCIALUFIDUCIAL  [FIDUCIAL-MICRO]  61.59,89.79 0 top
FD148  FIDUCIALUFIDUCIAL  [FIDUCIAL-MICRO]  61.59,89.79 0 bottom
FD149  FIDUCIALUFIDUCIAL  [FIDUCIAL-MICRO]  63.37,129.16 0 top
FD150  FIDUCIALUFIDUCIAL  [FIDUCIAL-MICRO]  63.37,129.16 0 bottom
FD151  FIDUCIALUFIDUCIAL  [FIDUCIAL-MICRO]  72.77,89.79 0 top
FD152  FIDUCIALUFIDUCIAL  [FIDUCIAL-MICRO]  72.77,89.79 0 bottom
FD153  FIDUCIALUFIDUCIAL  [FIDUCIAL-MICRO]  74.55,129.16 0 top
FD154  FIDUCIALUFIDUCIAL  [FIDUCIAL-MICRO]  74.55,129.16 0 bottom
FD155  FIDUCIALUFIDUCIAL  [FIDUCIAL-MICRO]  83.95,89.79 0 top
FD156  FIDUCIALUFIDUCIAL  [FIDUCIAL-MICRO]  83.95,89.79 0 bottom
FD157  FIDUCIALUFIDUCIAL  [FIDUCIAL-MICRO]  85.73,129.16 0 top
FD158  FIDUCIALUFIDUCIAL  [FIDUCIAL-MICRO]  85.73,129.16 0 bottom
FD159  FIDUCIALUFIDUCIAL  [FIDUCIAL-MICRO]  95.12,89.79 0 top
FD160  FIDUCIALUFIDUCIAL  [FIDUCIAL-MICRO]  95.12,89.79 0 bottom
FD161  FIDUCIALUFIDUCIAL  [FIDUCIAL-MICRO]  96.9,129.16 0 top
FD162  FIDUCIALUFIDUCIAL  [FIDUCIAL-MICRO]  96.9,129.16 0 bottom
FD163  FIDUCIALUFIDUCIAL  [FIDUCIAL-MICRO]  106.3,89.79 0 top
FD164  FIDUCIALUFIDUCIAL  [FIDUCIAL-MICRO]  106.3,89.79 0 bottom
FD165  FIDUCIALUFIDUCIAL  [FIDUCIAL-MICRO]  108.08,129.16 0 top
FD166  FIDUCIALUFIDUCIAL  [FIDUCIAL-MICRO]  108.08,129.16 0 bottom
FD167  FIDUCIALUFIDUCIAL  [FIDUCIAL-MICRO]  117.48,89.79 0 top
FD168  FIDUCIALUFIDUCIAL  [FIDUCIAL-MICRO]  117.48,89.79 0 bottom
FD169  FIDUCIALUFIDUCIAL  [FIDUCIAL-MICRO]  119.25,129.16 0 top
FD170  FIDUCIALUFIDUCIAL  [FIDUCIAL-MICRO]  119.25,129.16 0 bottom
FD171  FIDUCIALUFIDUCIAL  [FIDUCIAL-MICRO]  128.65,89.79 0 top
FD172  FIDUCIALUFIDUCIAL  [FIDUCIAL-MICRO]  128.65,89.79 0 bottom
FD173  FIDUCIALUFIDUCIAL  [FIDUCIAL-MICRO]  130.43,129.16 0 top
FD174  FIDUCIALUFIDUCIAL  [FIDUCIAL-MICRO]  130.43,129.16 0 bottom
FD175  FIDUCIALUFIDUCIAL  [FIDUCIAL-MICRO]  139.83,89.79 0 top
FD176  FIDUCIALUFIDUCIAL  [FIDUCIAL-MICRO]  139.83,89.79 0 bottom
FD177  FIDUCIALUFIDUCIAL  [FIDUCIAL-MICRO]  141.61,129.16 0 top
FD178  FIDUCIALUFIDUCIAL  [FIDUCIAL-MICRO]  141.61,129.16 0 bottom
FD179  FIDUCIALUFIDUCIAL  [FIDUCIAL-MICRO]  151,89.79 0 top
FD180  FIDUCIALUFIDUCIAL  [FIDUCIAL-MICRO]  151,89.79 0 bottom
FD181  FIDUCIALUFIDUCIAL  [FIDUCIAL-MICRO]  152.78,129.16 0 top
FD182  FIDUCIALUFIDUCIAL  [FIDUCIAL-MICRO]  152.78,129.16 0 bottom
FD183  FIDUCIALUFIDUCIAL  [FIDUCIAL-MICRO]  162.18,89.79 0 top
FD184  FIDUCIALUFIDUCIAL  [FIDUCIAL-MICRO]  162.18,89.79 0 bottom
FD185  FIDUCIALUFIDUCIAL  [FIDUCIAL-MICRO]  163.96,129.16 0 top
FD186  FIDUCIALUFIDUCIAL  [FIDUCIAL-MICRO]  163.96,129.16 0 bottom
FD187  FIDUCIALUFIDUCIAL  [FIDUCIAL-MICRO]  173.36,89.79 0 top
FD188  FIDUCIALUFIDUCIAL  [FIDUCIAL-MICRO]  173.36,89.79 0 bottom
FD189  FIDUCIALUFIDUCIAL  [FIDUCIAL-MICRO]  175.13,129.16 0 top
FD190  FIDUCIALUFIDUCIAL  [FIDUCIAL-MICRO]  175.13,129.16 0 bottom
FD191  FIDUCIALUFIDUCIAL  [FIDUCIAL-MICRO]  184.53,89.79 0 top
FD192  FIDUCIALUFIDUCIAL  [FIDUCIAL-MICRO]  184.53,89.79 0 bottom
IN  [FPC_16_0.5MM]  12.19,45.4 0 bottom
IN1  [FPC_16_0.5MM]  23.37,45.4 0 bottom
IN2  [FPC_16_0.5MM]  34.54,45.4 0 bottom
IN3  [FPC_16_0.5MM]  45.72,45.4 0 bottom
IN4  [FPC_16_0.5MM]  56.9,45.4 0 bottom
IN5  [FPC_16_0.5MM]  68.07,45.4 0 bottom
IN6  [FPC_16_0.5MM]  79.25,45.4 0 bottom
IN7  [FPC_16_0.5MM]  90.42,45.4 0 bottom
IN8  [FPC_16_0.5MM]  101.6,45.4 0 bottom
IN9  [FPC_16_0.5MM]  112.78,45.4 0 bottom
IN10  [FPC_16_0.5MM]  123.95,45.4 0 bottom
IN11  [FPC_16_0.5MM]  135.13,45.4 0 bottom
IN12  [FPC_16_0.5MM]  146.3,45.4 0 bottom
IN13  [FPC_16_0.5MM]  157.48,45.4 0 bottom
IN14  [FPC_16_0.5MM]  168.66,45.4 0 bottom
IN15  [FPC_16_0.5MM]  179.83,45.4 0 bottom
IN16  [FPC_16_0.5MM]  12.19,86.55 0 bottom
IN17  [FPC_16_0.5MM]  23.37,86.55 0 bottom
IN18  [FPC_16_0.5MM]  34.54,86.55 0 bottom
IN19  [FPC_16_0.5MM]  45.72,86.55 0 bottom
IN20  [FPC_16_0.5MM]  56.9,86.55 0 bottom
IN21  [FPC_16_0.5MM]  68.07,86.55 0 bottom
IN22  [FPC_16_0.5MM]  79.25,86.55 0 bottom
IN23  [FPC_16_0.5MM]  90.42,86.55 0 bottom
IN24  [FPC_16_0.5MM]  101.6,86.55 0 bottom
IN25  [FPC_16_0.5MM]  112.78,86.55 0 bottom
IN26  [FPC_16_0.5MM]  123.95,86.55 0 bottom
IN27  [FPC_16_0.5MM]  135.13,86.55 0 bottom
IN28  [FPC_16_0.5MM]  146.3,86.55 0 bottom
IN29  [FPC_16_0.5MM]  157.48,86.55 0 bottom
IN30  [FPC_16_0.5MM]  168.66,86.55 0 bottom
IN31  [FPC_16_0.5MM]  179.83,86.55 0 bottom
IN32  [FPC_16_0.5MM]  12.19,127.7 0 bottom
IN33  [FPC_16_0.5MM]  23.37,127.7 0 bottom
IN34  [FPC_16_0.5MM]  34.54,127.7 0 bottom
IN35  [FPC_16_0.5MM]  45.72,127.7 0 bottom
IN36  [FPC_16_0.5MM]  56.9,127.7 0 bottom
IN37  [FPC_16_0.5MM]  68.07,127.7 0 bottom
IN38  [FPC_16_0.5MM]  79.25,127.7 0 bottom
IN39  [FPC_16_0.5MM]  90.42,127.7 0 bottom
IN40  [FPC_16_0.5MM]  101.6,127.7 0 bottom
IN41  [FPC_16_0.5MM]  112.78,127.7 0 bottom
IN42  [FPC_16_0.5MM]  123.95,127.7 0 bottom
IN43  [FPC_16_0.5MM]  135.13,127.7 0 bottom
IN44  [FPC_16_0.5MM]  146.3,127.7 0 bottom
IN45  [FPC_16_0.5MM]  157.48,127.7 0 bottom
IN46  [FPC_16_0.5MM]  168.66,127.7 0 bottom
IN47  [FPC_16_0.5MM]  179.83,127.7 0 bottom
JP1  JUMPER-SMT_3_NO_SILK  [SMT-JUMPER_3_NO_SILK]  12.19,18.92 90 bottom
JP2  JUMPER-SMT_3_NO_SILK  [SMT-JUMPER_3_NO_SILK]  23.37,18.92 90 bottom
JP3  JUMPER-SMT_3_NO_SILK  [SMT-JUMPER_3_NO_SILK]  34.54,18.92 90 bottom
JP4  JUMPER-SMT_3_NO_SILK  [SMT-JUMPER_3_NO_SILK]  45.72,18.92 90 bottom
JP5  JUMPER-SMT_3_NO_SILK  [SMT-JUMPER_3_NO_SILK]  56.9,18.92 90 bottom
JP6  JUMPER-SMT_3_NO_SILK  [SMT-JUMPER_3_NO_SILK]  68.07,18.92 90 bottom
JP7  JUMPER-SMT_3_NO_SILK  [SMT-JUMPER_3_NO_SILK]  79.25,18.92 90 bottom
JP8  JUMPER-SMT_3_NO_SILK  [SMT-JUMPER_3_NO_SILK]  90.42,18.92 90 bottom
JP9  JUMPER-SMT_3_NO_SILK  [SMT-JUMPER_3_NO_SILK]  101.6,18.92 90 bottom
JP10  JUMPER-SMT_3_NO_SILK  [SMT-JUMPER_3_NO_SILK]  112.78,18.92 90 bottom
JP11  JUMPER-SMT_3_NO_SILK  [SMT-JUMPER_3_NO_SILK]  123.95,18.92 90 bottom
JP12  JUMPER-SMT_3_NO_SILK  [SMT-JUMPER_3_NO_SILK]  135.13,18.92 90 bottom
JP13  JUMPER-SMT_3_NO_SILK  [SMT-JUMPER_3_NO_SILK]  146.3,18.92 90 bottom
JP14  JUMPER-SMT_3_NO_SILK  [SMT-JUMPER_3_NO_SILK]  157.48,18.92 90 bottom
JP15  JUMPER-SMT_3_NO_SILK  [SMT-JUMPER_3_NO_SILK]  168.66,18.92 90 bottom
JP16  JUMPER-SMT_3_NO_SILK  [SMT-JUMPER_3_NO_SILK]  179.83,18.92 90 bottom
JP17  JUMPER-SMT_3_NO_SILK  [SMT-JUMPER_3_NO_SILK]  12.19,60.07 90 bottom
JP18  JUMPER-SMT_3_NO_SILK  [SMT-JUMPER_3_NO_SILK]  23.37,60.07 90 bottom
JP19  JUMPER-SMT_3_NO_SILK  [SMT-JUMPER_3_NO_SILK]  34.54,60.07 90 bottom
JP20  JUMPER-SMT_3_NO_SILK  [SMT-JUMPER_3_NO_SILK]  45.72,60.07 90 bottom
JP21  JUMPER-SMT_3_NO_SILK  [SMT-JUMPER_3_NO_SILK]  56.9,60.07 90 bottom
JP22  JUMPER-SMT_3_NO_SILK  [SMT-JUMPER_3_NO_SILK]  68.07,60.07 90 bottom
JP23  JUMPER-SMT_3_NO_SILK  [SMT-JUMPER_3_NO_SILK]  79.25,60.07 90 bottom
JP24  JUMPER-SMT_3_NO_SILK  [SMT-JUMPER_3_NO_SILK]  90.42,60.07 90 bottom
JP25  JUMPER-SMT_3_NO_SILK  [SMT-JUMPER_3_NO_SILK]  101.6,60.07 90 bottom
JP26  JUMPER-SMT_3_NO_SILK  [SMT-JUMPER_3_NO_SILK]  112.78,60.07 90 bottom
JP27  JUMPER-SMT_3_NO_SILK  [SMT-JUMPER_3_NO_SILK]  123.95,60.07 90 bottom
JP28  JUMPER-SMT_3_NO_SILK  [SMT-JUMPER_3_NO_SILK]  135.13,60.07 90 bottom
JP29  JUMPER-SMT_3_NO_SILK  [SMT-JUMPER_3_NO_SILK]  146.3,60.07 90 bottom
JP30  JUMPER-SMT_3_NO_SILK  [SMT-JUMPER_3_NO_SILK]  157.48,60.07 90 bottom
JP31  JUMPER-SMT_3_NO_SILK  [SMT-JUMPER_3_NO_SILK]  168.66,60.07 90 bottom
JP32  JUMPER-SMT_3_NO_SILK  [SMT-JUMPER_3_NO_SILK]  179.83,60.07 90 bottom
JP33  JUMPER-SMT_3_NO_SILK  [SMT-JUMPER_3_NO_SILK]  12.19,101.22 90 bottom
JP34  JUMPER-SMT_3_NO_SILK  [SMT-JUMPER_3_NO_SILK]  23.37,101.22 90 bottom
JP35  JUMPER-SMT_3_NO_SILK  [SMT-JUMPER_3_NO_SILK]  34.54,101.22 90 bottom
JP36  JUMPER-SMT_3_NO_SILK  [SMT-JUMPER_3_NO_SILK]  45.72,101.22 90 bottom
JP37  JUMPER-SMT_3_NO_SILK  [SMT-JUMPER_3_NO_SILK]  56.9,101.22 90 bottom
JP38  JUMPER-SMT_3_NO_SILK  [SMT-JUMPER_3_NO_SILK]  68.07,101.22 90 bottom
JP39  JUMPER-SMT_3_NO_SILK  [SMT-JUMPER_3_NO_SILK]  79.25,101.22 90 bottom
JP40  JUMPER-SMT_3_NO_SILK  [SMT-JUMPER_3_NO_SILK]  90.42,101.22 90 bottom
JP41  JUMPER-SMT_3_NO_SILK  [SMT-JUMPER_3_NO_SILK]  101.6,101.22 90 bottom
JP42  JUMPER-SMT_3_NO_SILK  [SMT-JUMPER_3_NO_SILK]  112.78,101.22 90 bottom
JP43  JUMPER-SMT_3_NO_SILK  [SMT-JUMPER_3_NO_SILK]  123.95,101.22 90 bottom
JP44  JUMPER-SMT_3_NO_SILK  [SMT-JUMPER_3_NO_SILK]  135.13,101.22 90 bottom
JP45  JUMPER-SMT_3_NO_SILK  [SMT-JUMPER_3_NO_SILK]  146.3,101.22 90 bottom
JP46  JUMPER-SMT_3_NO_SILK  [SMT-JUMPER_3_NO_SILK]  157.48,101.22 90 bottom
JP47  JUMPER-SMT_3_NO_SILK  [SMT-JUMPER_3_NO_SILK]  168.66,101.22 90 bottom
JP48  JUMPER-SMT_3_NO_SILK  [SMT-JUMPER_3_NO_SILK]  179.83,101.22 90 bottom
LOGO1  OSHW-LOGOMINI  [OSHW-LOGO-MINI]  23.37,21.46 0 top
LOGO2  OSHW-LOGOMINI  [OSHW-LOGO-MINI]  12.19,21.46 0 top
LOGO3  OSHW-LOGOMINI  [OSHW-LOGO-MINI]  9.4,27.18 270 bottom
LOGO4  OSHW-LOGOMINI  [OSHW-LOGO-MINI]  20.57,27.18 270 bottom
LOGO5  OSHW-LOGOMINI  [OSHW-LOGO-MINI]  34.54,21.46 0 top
LOGO6  OSHW-LOGOMINI  [OSHW-LOGO-MINI]  31.75,27.18 270 bottom
LOGO7  OSHW-LOGOMINI  [OSHW-LOGO-MINI]  45.72,21.46 0 top
LOGO8  OSHW-LOGOMINI  [OSHW-LOGO-MINI]  42.93,27.18 270 bottom
LOGO9  OSHW-LOGOMINI  [OSHW-LOGO-MINI]  56.9,21.46 0 top
LOGO10  OSHW-LOGOMINI  [OSHW-LOGO-MINI]  54.1,27.18 270 bottom
LOGO11  OSHW-LOGOMINI  [OSHW-LOGO-MINI]  68.07,21.46 0 top
LOGO12  OSHW-LOGOMINI  [OSHW-LOGO-MINI]  65.28,27.18 270 bottom
LOGO13  OSHW-LOGOMINI  [OSHW-LOGO-MINI]  79.25,21.46 0 top
LOGO14  OSHW-LOGOMINI  [OSHW-LOGO-MINI]  76.45,27.18 270 bottom
LOGO15  OSHW-LOGOMINI  [OSHW-LOGO-MINI]  90.42,21.46 0 top
LOGO16  OSHW-LOGOMINI  [OSHW-LOGO-MINI]  87.63,27.18 270 bottom
LOGO17  OSHW-LOGOMINI  [OSHW-LOGO-MINI]  101.6,21.46 0 top
LOGO18  OSHW-LOGOMINI  [OSHW-LOGO-MINI]  98.81,27.18 270 bottom
LOGO19  OSHW-LOGOMINI  [OSHW-LOGO-MINI]  112.78,21.46 0 top
LOGO20  OSHW-LOGOMINI  [OSHW-LOGO-MINI]  109.98,27.18 270 bottom
LOGO21  OSHW-LOGOMINI  [OSHW-LOGO-MINI]  123.95,21.46 0 top
LOGO22  OSHW-LOGOMINI  [OSHW-LOGO-MINI]  121.16,27.18 270 bottom
LOGO23  OSHW-LOGOMINI  [OSHW-LOGO-MINI]  135.13,21.46 0 top
LOGO24  OSHW-LOGOMINI  [OSHW-LOGO-MINI]  132.33,27.18 270 bottom
LOGO25  OSHW-LOGOMINI  [OSHW-LOGO-MINI]  146.3,21.46 0 top
LOGO26  OSHW-LOGOMINI  [OSHW-LOGO-MINI]  143.51,27.18 270 bottom
LOGO27  OSHW-LOGOMINI  [OSHW-LOGO-MINI]  157.48,21.46 0 top
LOGO28  OSHW-LOGOMINI  [OSHW-LOGO-MINI]  154.69,27.18 270 bottom
LOGO29  OSHW-LOGOMINI  [OSHW-LOGO-MINI]  168.66,21.46 0 top
LOGO30  OSHW-LOGOMINI  [OSHW-LOGO-MINI]  165.86,27.18 270 bottom
LOGO31  OSHW-LOGOMINI  [OSHW-LOGO-MINI]  179.83,21.46 0 top
LOGO32  OSHW-LOGOMINI  [OSHW-LOGO-MINI]  177.04,27.18 270 bottom
LOGO33  OSHW-LOGOMINI  [OSHW-LOGO-MINI]  12.19,62.61 0 top
LOGO34  OSHW-LOGOMINI  [OSHW-LOGO-MINI]  9.4,68.33 270 bottom
LOGO35  OSHW-LOGOMINI  [OSHW-LOGO-MINI]  23.37,62.61 0 top
LOGO36  OSHW-LOGOMINI  [OSHW-LOGO-MINI]  20.57,68.33 270 bottom
LOGO37  OSHW-LOGOMINI  [OSHW-LOGO-MINI]  34.54,62.61 0 top
LOGO38  OSHW-LOGOMINI  [OSHW-LOGO-MINI]  31.75,68.33 270 bottom
LOGO39  OSHW-LOGOMINI  [OSHW-LOGO-MINI]  45.72,62.61 0 top
LOGO40  OSHW-LOGOMINI  [OSHW-LOGO-MINI]  42.93,68.33 270 bottom
LOGO41  OSHW-LOGOMINI  [OSHW-LOGO-MINI]  56.9,62.61 0 top
LOGO42  OSHW-LOGOMINI  [OSHW-LOGO-MINI]  54.1,68.33 270 bottom
LOGO43  OSHW-LOGOMINI  [OSHW-LOGO-MINI]  68.07,62.61 0 top
LOGO44  OSHW-LOGOMINI  [OSHW-LOGO-MINI]  65.28,68.33 270 bottom
LOGO45  OSHW-LOGOMINI  [OSHW-LOGO-MINI]  79.25,62.61 0 top
LOGO46  OSHW-LOGOMINI  [OSHW-LOGO-MINI]  76.45,68.33 270 bottom
LOGO47  OSHW-LOGOMINI  [OSHW-LOGO-MINI]  90.42,62.61 0 top
LOGO48  OSHW-LOGOMINI  [OSHW-LOGO-MINI]  87.63,68.33 270 bottom
LOGO49  OSHW-LOGOMINI  [OSHW-LOGO-MINI]  101.6,62.61 0 top
LOGO50  OSHW-LOGOMINI  [OSHW-LOGO-MINI]  98.81,68.33 270 bottom
LOGO51  OSHW-LOGOMINI  [OSHW-LOGO-MINI]  112.78,62.61 0 top
LOGO52  OSHW-LOGOMINI  [OSHW-LOGO-MINI]  109.98,68.33 270 bottom
LOGO53  OSHW-LOGOMINI  [OSHW-LOGO-MINI]  123.95,62.61 0 top
LOGO54  OSHW-LOGOMINI  [OSHW-LOGO-MINI]  121.16,68.33 270 bottom
LOGO55  OSHW-LOGOMINI  [OSHW-LOGO-MINI]  135.13,62.61 0 top
LOGO56  OSHW-LOGOMINI  [OSHW-LOGO-MINI]  132.33,68.33 270 bottom
LOGO57  OSHW-LOGOMINI  [OSHW-LOGO-MINI]  146.3,62.61 0 top
LOGO58  OSHW-LOGOMINI  [OSHW-LOGO-MINI]  143.51,68.33 270 bottom
LOGO59  OSHW-LOGOMINI  [OSHW-LOGO-MINI]  157.48,62.61 0 top
LOGO60  OSHW-LOGOMINI  [OSHW-LOGO-MINI]  154.69,68.33 270 bottom
LOGO61  OSHW-LOGOMINI  [OSHW-LOGO-MINI]  168.66,62.61 0 top
LOGO62  OSHW-LOGOMINI  [OSHW-LOGO-MINI]  165.86,68.33 270 bottom
LOGO63  OSHW-LOGOMINI  [OSHW-LOGO-MINI]  179.83,62.61 0 top
LOGO64  OSHW-LOGOMINI  [OSHW-LOGO-MINI]  177.04,68.33 270 bottom
LOGO65  OSHW-LOGOMINI  [OSHW-LOGO-MINI]  12.19,103.76 0 top
LOGO66  OSHW-LOGOMINI  [OSHW-LOGO-MINI]  9.4,109.47 270 bottom
LOGO67  OSHW-LOGOMINI  [OSHW-LOGO-MINI]  23.37,103.76 0 top
LOGO68  OSHW-LOGOMINI  [OSHW-LOGO-MINI]  20.57,109.47 270 bottom
LOGO69  OSHW-LOGOMINI  [OSHW-LOGO-MINI]  34.54,103.76 0 top
LOGO70  OSHW-LOGOMINI  [OSHW-LOGO-MINI]  31.75,109.47 270 bottom
LOGO71  OSHW-LOGOMINI  [OSHW-LOGO-MINI]  45.72,103.76 0 top
LOGO72  OSHW-LOGOMINI  [OSHW-LOGO-MINI]  42.93,109.47 270 bottom
LOGO73  OSHW-LOGOMINI  [OSHW-LOGO-MINI]  56.9,103.76 0 top
LOGO74  OSHW-LOGOMINI  [OSHW-LOGO-MINI]  54.1,109.47 270 bottom
LOGO75  OSHW-LOGOMINI  [OSHW-LOGO-MINI]  68.07,103.76 0 top
LOGO76  OSHW-LOGOMINI  [OSHW-LOGO-MINI]  65.28,109.47 270 bottom
LOGO77  OSHW-LOGOMINI  [OSHW-LOGO-MINI]  79.25,103.76 0 top
LOGO78  OSHW-LOGOMINI  [OSHW-LOGO-MINI]  76.45,109.47 270 bottom
LOGO79  OSHW-LOGOMINI  [OSHW-LOGO-MINI]  90.42,103.76 0 top
LOGO80  OSHW-LOGOMINI  [OSHW-LOGO-MINI]  87.63,109.47 270 bottom
LOGO81  OSHW-LOGOMINI  [OSHW-LOGO-MINI]  101.6,103.76 0 top
LOGO82  OSHW-LOGOMINI  [OSHW-LOGO-MINI]  98.81,109.47 270 bottom
LOGO83  OSHW-LOGOMINI  [OSHW-LOGO-MINI]  112.78,103.76 0 top
LOGO84  OSHW-LOGOMINI  [OSHW-LOGO-MINI]  109.98,109.47 270 bottom
LOGO85  OSHW-LOGOMINI  [OSHW-LOGO-MINI]  123.95,103.76 0 top
LOGO86  OSHW-LOGOMINI  [OSHW-LOGO-MINI]  121.16,109.47 270 bottom
LOGO87  OSHW-LOGOMINI  [OSHW-LOGO-MINI]  135.13,103.76 0 top
LOGO88  OSHW-LOGOMINI  [OSHW-LOGO-MINI]  132.33,109.47 270 bottom
LOGO89  OSHW-LOGOMINI  [OSHW-LOGO-MINI]  146.3,103.76 0 top
LOGO90  OSHW-LOGOMINI  [OSHW-LOGO-MINI]  143.51,109.47 270 bottom
LOGO91  OSHW-LOGOMINI  [OSHW-LOGO-MINI]  157.48,103.76 0 top
LOGO92  OSHW-LOGOMINI  [OSHW-LOGO-MINI]  154.69,109.47 270 bottom
LOGO93  OSHW-LOGOMINI  [OSHW-LOGO-MINI]  168.66,103.76 0 top
LOGO94  OSHW-LOGOMINI  [OSHW-LOGO-MINI]  165.86,109.47 270 bottom
LOGO95  OSHW-LOGOMINI  [OSHW-LOGO-MINI]  179.83,103.76 0 top
LOGO96  OSHW-LOGOMINI  [OSHW-LOGO-MINI]  177.04,109.47 270 bottom
OUT  [FPC_16_0.5MM]  12.19,8.95 180 top
OUT1  [FPC_16_0.5MM]  23.37,8.95 180 top
OUT2  [FPC_16_0.5MM]  34.54,8.95 180 top
OUT3  [FPC_16_0.5MM]  45.72,8.95 180 top
OUT4  [FPC_16_0.5MM]  56.9,8.95 180 top
OUT5  [FPC_16_0.5MM]  68.07,8.95 180 top
OUT6  [FPC_16_0.5MM]  79.25,8.95 180 top
OUT7  [FPC_16_0.5MM]  90.42,8.95 180 top
OUT8  [FPC_16_0.5MM]  101.6,8.95 180 top
OUT9  [FPC_16_0.5MM]  112.78,8.95 180 top
OUT10  [FPC_16_0.5MM]  123.95,8.95 180 top
OUT11  [FPC_16_0.5MM]  135.13,8.95 180 top
OUT12  [FPC_16_0.5MM]  146.3,8.95 180 top
OUT13  [FPC_16_0.5MM]  157.48,8.95 180 top
OUT14  [FPC_16_0.5MM]  168.66,8.95 180 top
OUT15  [FPC_16_0.5MM]  179.83,8.95 180 top
OUT16  [FPC_16_0.5MM]  12.19,50.1 180 top
OUT17  [FPC_16_0.5MM]  23.37,50.1 180 top
OUT18  [FPC_16_0.5MM]  34.54,50.1 180 top
OUT19  [FPC_16_0.5MM]  45.72,50.1 180 top
OUT20  [FPC_16_0.5MM]  56.9,50.1 180 top
OUT21  [FPC_16_0.5MM]  68.07,50.1 180 top
OUT22  [FPC_16_0.5MM]  79.25,50.1 180 top
OUT23  [FPC_16_0.5MM]  90.42,50.1 180 top
OUT24  [FPC_16_0.5MM]  101.6,50.1 180 top
OUT25  [FPC_16_0.5MM]  112.78,50.1 180 top
OUT26  [FPC_16_0.5MM]  123.95,50.1 180 top
OUT27  [FPC_16_0.5MM]  135.13,50.1 180 top
OUT28  [FPC_16_0.5MM]  146.3,50.1 180 top
OUT29  [FPC_16_0.5MM]  157.48,50.1 180 top
OUT30  [FPC_16_0.5MM]  168.66,50.1 180 top
OUT31  [FPC_16_0.5MM]  179.83,50.1 180 top
OUT32  [FPC_16_0.5MM]  12.19,91.25 180 top
OUT33  [FPC_16_0.5MM]  23.37,91.25 180 top
OUT34  [FPC_16_0.5MM]  34.54,91.25 180 top
OUT35  [FPC_16_0.5MM]  45.72,91.25 180 top
OUT36  [FPC_16_0.5MM]  56.9,91.25 180 top
OUT37  [FPC_16_0.5MM]  68.07,91.25 180 top
OUT38  [FPC_16_0.5MM]  79.25,91.25 180 top
OUT39  [FPC_16_0.5MM]  90.42,91.25 180 top
OUT40  [FPC_16_0.5MM]  101.6,91.25 180 top
OUT41  [FPC_16_0.5MM]  112.78,91.25 180 top
OUT42  [FPC_16_0.5MM]  123.95,91.25 180 top
OUT43  [FPC_16_0.5MM]  135.13,91.25 180 top
OUT44  [FPC_16_0.5MM]  146.3,91.25 180 top
OUT45  [FPC_16_0.5MM]  157.48,91.25 180 top
OUT46  [FPC_16_0.5MM]  168.66,91.25 180 top
OUT47  [FPC_16_0.5MM]  179.83,91.25 180 top
R1  4.7k  [0402-TIGHT]  23.37,19.56 180 top
R2  4.7k  [0402-TIGHT]  12.19,19.56 180 top
R3  4.7k  [0402-TIGHT]  12.19,18.41 180 top
R4  4.7k  [0402-TIGHT]  23.37,18.41 180 top
R5  4.7k  [0402-TIGHT]  34.54,19.56 180 top
R6  4.7k  [0402-TIGHT]  34.54,18.41 180 top
R7  4.7k  [0402-TIGHT]  45.72,19.56 180 top
R8  4.7k  [0402-TIGHT]  45.72,18.41 180 top
R9  4.7k  [0402-TIGHT]  56.9,19.56 180 top
R10  4.7k  [0402-TIGHT]  56.9,18.41 180 top
R11  4.7k  [0402-TIGHT]  68.07,19.56 180 top
R12  4.7k  [0402-TIGHT]  68.07,18.41 180 top
R13  4.7k  [0402-TIGHT]  79.25,19.56 180 top
R14  4.7k  [0402-TIGHT]  79.25,18.41 180 top
R15  4.7k  [0402-TIGHT]  90.42,19.56 180 top
R16  4.7k  [0402-TIGHT]  90.42,18.41 180 top
R17  4.7k  [0402-TIGHT]  101.6,19.56 180 top
R18  4.7k  [0402-TIGHT]  101.6,18.41 180 top
R19  4.7k  [0402-TIGHT]  112.78,19.56 180 top
R20  4.7k  [0402-TIGHT]  112.78,18.41 180 top
R21  4.7k  [0402-TIGHT]  123.95,19.56 180 top
R22  4.7k  [0402-TIGHT]  123.95,18.41 180 top
R23  4.7k  [0402-TIGHT]  135.13,19.56 180 top
R24  4.7k  [0402-TIGHT]  135.13,18.41 180 top
R25  4.7k  [0402-TIGHT]  146.3,19.56 180 top
R26  4.7k  [0402-TIGHT]  146.3,18.41 180 top
R27  4.7k  [0402-TIGHT]  157.48,19.56 180 top
R28  4.7k  [0402-TIGHT]  157.48,18.41 180 top
R29  4.7k  [0402-TIGHT]  168.66,19.56 180 top
R30  4.7k  [0402-TIGHT]  168.66,18.41 180 top
R31  4.7k  [0402-TIGHT]  179.83,19.56 180 top
R32  4.7k  [0402-TIGHT]  179.83,18.41 180 top
R33  4.7k  [0402-TIGHT]  12.19,60.71 180 top
R34  4.7k  [0402-TIGHT]  12.19,59.56 180 top
R35  4.7k  [0402-TIGHT]  23.37,60.71 180 top
R36  4.7k  [0402-TIGHT]  23.37,59.56 180 top
R37  4.7k  [0402-TIGHT]  34.54,60.71 180 top
R38  4.7k  [0402-TIGHT]  34.54,59.56 180 top
R39  4.7k  [0402-TIGHT]  45.72,60.71 180 top
R40  4.7k  [0402-TIGHT]  45.72,59.56 180 top
R41  4.7k  [0402-TIGHT]  56.9,60.71 180 top
R42  4.7k  [0402-TIGHT]  56.9,59.56 180 top
R43  4.7k  [0402-TIGHT]  68.07,60.71 180 top
R44  4.7k  [0402-TIGHT]  68.07,59.56 180 top
R45  4.7k  [0402-TIGHT]  79.25,60.71 180 top
R46  4.7k  [0402-TIGHT]  79.25,59.56 180 top
R47  4.7k  [0402-TIGHT]  90.42,60.71 180 top
R48  4.7k  [0402-TIGHT]  90.42,59.56 180 top
R49  4.7k  [0402-TIGHT]  101.6,60.71 180 top
R50  4.7k  [0402-TIGHT]  101.6,59.56 180 top
R51  4.7k  [0402-TIGHT]  112.78,60.71 180 top
R52  4.7k  [0402-TIGHT]  112.78,59.56 180 top
R53  4.7k  [0402-TIGHT]  123.95,60.71 180 top
R54  4.7k  [0402-TIGHT]  123.95,59.56 180 top
R55  4.7k  [0402-TIGHT]  135.13,60.71 180 top
R56  4.7k  [0402-TIGHT]  135.13,59.56 180 top
R57  4.7k  [0402-TIGHT]  146.3,60.71 180 top
R58  4.7k  [0402-TIGHT]  146.3,59.56 180 top
R59  4.7k  [0402-TIGHT]  157.48,60.71 180 top
R60  4.7k  [0402-TIGHT]  157.48,59.56 180 top
R61  4.7k  [0402-TIGHT]  168.66,60.71 180 top
R62  4.7k  [0402-TIGHT]  168.66,59.56 180 top
R63  4.7k  [0402-TIGHT]  179.83,60.71 180 top
R64  4.7k  [0402-TIGHT]  179.83,59.56 180 top
R65  4.7k  [0402-TIGHT]  12.19,101.85 180 top
R66  4.7k  [0402-TIGHT]  12.19,100.71 180 top
R67  4.7k  [0402-TIGHT]  23.37,101.85 180 top
R68  4.7k  [0402-TIGHT]  23.37,100.71 180 top
R69  4.7k  [0402-TIGHT]  34.54,101.85 180 top
R70  4.7k  [0402-TIGHT]  34.54,100.71 180 top
R71  4.7k  [0402-TIGHT]  45.72,101.85 180 top
R72  4.7k  [0402-TIGHT]  45.72,100.71 180 top
R73  4.7k  [0402-TIGHT]  56.9,101.85 180 top
R74  4.7k  [0402-TIGHT]  56.9,100.71 180 top
R75  4.7k  [0402-TIGHT]  68.07,101.85 180 top
R76  4.7k  [0402-TIGHT]  68.07,100.71 180 top
R77  4.7k  [0402-TIGHT]  79.25,101.85 180 top
R78  4.7k  [0402-TIGHT]  79.25,100.71 180 top
R79  4.7k  [0402-TIGHT]  90.42,101.85 180 top
R80  4.7k  [0402-TIGHT]  90.42,100.71 180 top
R81  4.7k  [0402-TIGHT]  101.6,101.85 180 top
R82  4.7k  [0402-TIGHT]  101.6,100.71 180 top
R83  4.7k  [0402-TIGHT]  112.78,101.85 180 top
R84  4.7k  [0402-TIGHT]  112.78,100.71 180 top
R85  4.7k  [0402-TIGHT]  123.95,101.85 180 top
R86  4.7k  [0402-TIGHT]  123.95,100.71 180 top
R87  4.7k  [0402-TIGHT]  135.13,101.85 180 top
R88  4.7k  [0402-TIGHT]  135.13,100.71 180 top
R89  4.7k  [0402-TIGHT]  146.3,101.85 180 top
R90  4.7k  [0402-TIGHT]  146.3,100.71 180 top
R91  4.7k  [0402-TIGHT]  157.48,101.85 180 top
R92  4.7k  [0402-TIGHT]  157.48,100.71 180 top
R93  4.7k  [0402-TIGHT]  168.66,101.85 180 top
R94  4.7k  [0402-TIGHT]  168.66,100.71 180 top
R95  4.7k  [0402-TIGHT]  179.83,101.85 180 top
R96  4.7k  [0402-TIGHT]  179.83,100.71 180 top
U1  ST25DV64KC  [SO08]  12.19,37.34 0 top
U2  ST25DV64KC  [SO08]  23.37,37.34 0 top
U3  ST25DV64KC  [SO08]  34.54,37.34 0 top
U4  ST25DV64KC  [SO08]  45.72,37.34 0 top
U5  ST25DV64KC  [SO08]  56.9,37.34 0 top
U6  ST25DV64KC  [SO08]  68.07,37.34 0 top
U7  ST25DV64KC  [SO08]  79.25,37.34 0 top
U8  ST25DV64KC  [SO08]  90.42,37.34 0 top
U9  ST25DV64KC  [SO08]  101.6,37.34 0 top
U10  ST25DV64KC  [SO08]  112.78,37.34 0 top
U11  ST25DV64KC  [SO08]  123.95,37.34 0 top
U12  ST25DV64KC  [SO08]  135.13,37.34 0 top
U13  ST25DV64KC  [SO08]  146.3,37.34 0 top
U14  ST25DV64KC  [SO08]  157.48,37.34 0 top
U15  ST25DV64KC  [SO08]  168.66,37.34 0 top
U16  ST25DV64KC  [SO08]  179.83,37.34 0 top
U17  ST25DV64KC  [SO08]  12.19,78.49 0 top
U18  ST25DV64KC  [SO08]  23.37,78.49 0 top
U19  ST25DV64KC  [SO08]  34.54,78.49 0 top
U20  ST25DV64KC  [SO08]  45.72,78.49 0 top
U21  ST25DV64KC  [SO08]  56.9,78.49 0 top
U22  ST25DV64KC  [SO08]  68.07,78.49 0 top
U23  ST25DV64KC  [SO08]  79.25,78.49 0 top
U24  ST25DV64KC  [SO08]  90.42,78.49 0 top
U25  ST25DV64KC  [SO08]  101.6,78.49 0 top
U26  ST25DV64KC  [SO08]  112.78,78.49 0 top
U27  ST25DV64KC  [SO08]  123.95,78.49 0 top
U28  ST25DV64KC  [SO08]  135.13,78.49 0 top
U29  ST25DV64KC  [SO08]  146.3,78.49 0 top
U30  ST25DV64KC  [SO08]  157.48,78.49 0 top
U31  ST25DV64KC  [SO08]  168.66,78.49 0 top
U32  ST25DV64KC  [SO08]  179.83,78.49 0 top
U33  ST25DV64KC  [SO08]  12.19,119.63 0 top
U34  ST25DV64KC  [SO08]  23.37,119.63 0 top
U35  ST25DV64KC  [SO08]  34.54,119.63 0 top
U36  ST25DV64KC  [SO08]  45.72,119.63 0 top
U37  ST25DV64KC  [SO08]  56.9,119.63 0 top
U38  ST25DV64KC  [SO08]  68.07,119.63 0 top
U39  ST25DV64KC  [SO08]  79.25,119.63 0 top
U40  ST25DV64KC  [SO08]  90.42,119.63 0 top
U41  ST25DV64KC  [SO08]  101.6,119.63 0 top
U42  ST25DV64KC  [SO08]  112.78,119.63 0 top
U43  ST25DV64KC  [SO08]  123.95,119.63 0 top
U44  ST25DV64KC  [SO08]  135.13,119.63 0 top
U45  ST25DV64KC  [SO08]  146.3,119.63 0 top
U46  ST25DV64KC  [SO08]  157.48,119.63 0 top
U47  ST25DV64KC  [SO08]  168.66,119.63 0 top
U48  ST25DV64KC  [SO08]  179.83,119.63 0 top
U$1  SPARKX-LOGO3  [SPARKX-SMALL]  12.19,16.38 0 top
U$2  [SM�L_NFC#RFID_TAG0]  16.13,37.34 90 top
U$3  SMOL_LOGOSMALL  [SMOL_SMALL]  12.19,13.27 0 top
U$4  [SM�L_NFC#RFID_TAG0]  14.48,27.18 270 bottom
U$5  [#I�C#0]  10.1,18.99 270 bottom
U$6  SPARKX-LOGO3  [SPARKX-SMALL]  23.37,16.38 0 top
U$7  SPARKX-LOGO3  [SPARKX-SMALL]  23.37,27.18 270 bottom
U$8  [IN0]  12.19,41.34 0 bottom
U$9  SMOL_LOGOSMALL  [SMOL_SMALL]  12.19,42.67 0 bottom
U$10  [IN0]  23.37,41.34 0 bottom
U$11  [OUT0]  23.37,11.43 0 top
U$12  SMOL_LOGOSMALL  [SMOL_SMALL]  23.37,13.27 0 top
U$13  SMOL_LOGOSMALL  [SMOL_SMALL]  23.37,42.67 0 bottom
U$14  [SM�L_NFC#RFID_TAG0]  27.3,37.34 90 top
U$15  [SM�L_NFC#RFID_TAG0]  25.65,27.18 270 bottom
U$16  [#I�C#0]  21.27,18.99 270 bottom
U$17  [OUT0]  12.19,11.43 0 top
U$18  SPARKX-LOGO3  [SPARKX-SMALL]  34.54,16.38 0 top
U$19  SPARKX-LOGO3  [SPARKX-SMALL]  34.54,27.18 270 bottom
U$20  SPARKX-LOGO3  [SPARKX-SMALL]  12.19,27.18 270 bottom
U$21  [IN0]  34.54,41.34 0 bottom
U$22  [OUT0]  34.54,11.43 0 top
U$23  SMOL_LOGOSMALL  [SMOL_SMALL]  34.54,13.27 0 top
U$24  SMOL_LOGOSMALL  [SMOL_SMALL]  34.54,42.67 0 bottom
U$25  [SM�L_NFC#RFID_TAG0]  38.48,37.34 90 top
U$26  [SM�L_NFC#RFID_TAG0]  36.83,27.18 270 bottom
U$27  [#I�C#0]  32.45,18.99 270 bottom
U$28  SPARKX-LOGO3  [SPARKX-SMALL]  45.72,16.38 0 top
U$29  SPARKX-LOGO3  [SPARKX-SMALL]  45.72,27.18 270 bottom
U$30  [IN0]  45.72,41.34 0 bottom
U$31  [OUT0]  45.72,11.43 0 top
U$32  SMOL_LOGOSMALL  [SMOL_SMALL]  45.72,13.27 0 top
U$33  SMOL_LOGOSMALL  [SMOL_SMALL]  45.72,42.67 0 bottom
U$34  [SM�L_NFC#RFID_TAG0]  49.66,37.34 90 top
U$35  [SM�L_NFC#RFID_TAG0]  48.01,27.18 270 bottom
U$36  [#I�C#0]  43.62,18.99 270 bottom
U$37  SPARKX-LOGO3  [SPARKX-SMALL]  56.9,16.38 0 top
U$38  SPARKX-LOGO3  [SPARKX-SMALL]  56.9,27.18 270 bottom
U$39  [IN0]  56.9,41.34 0 bottom
U$40  [OUT0]  56.9,11.43 0 top
U$41  SMOL_LOGOSMALL  [SMOL_SMALL]  56.9,13.27 0 top
U$42  SMOL_LOGOSMALL  [SMOL_SMALL]  56.9,42.67 0 bottom
U$43  [SM�L_NFC#RFID_TAG0]  60.83,37.34 90 top
U$44  [SM�L_NFC#RFID_TAG0]  59.18,27.18 270 bottom
U$45  [#I�C#0]  54.8,18.99 270 bottom
U$46  SPARKX-LOGO3  [SPARKX-SMALL]  68.07,16.38 0 top
U$47  SPARKX-LOGO3  [SPARKX-SMALL]  68.07,27.18 270 bottom
U$48  [IN0]  68.07,41.34 0 bottom
U$49  [OUT0]  68.07,11.43 0 top
U$50  SMOL_LOGOSMALL  [SMOL_SMALL]  68.07,13.27 0 top
U$51  SMOL_LOGOSMALL  [SMOL_SMALL]  68.07,42.67 0 bottom
U$52  [SM�L_NFC#RFID_TAG0]  72.01,37.34 90 top
U$53  [SM�L_NFC#RFID_TAG0]  70.36,27.18 270 bottom
U$54  [#I�C#0]  65.98,18.99 270 bottom
U$55  SPARKX-LOGO3  [SPARKX-SMALL]  79.25,16.38 0 top
U$56  SPARKX-LOGO3  [SPARKX-SMALL]  79.25,27.18 270 bottom
U$57  [IN0]  79.25,41.34 0 bottom
U$58  [OUT0]  79.25,11.43 0 top
U$59  SMOL_LOGOSMALL  [SMOL_SMALL]  79.25,13.27 0 top
U$60  SMOL_LOGOSMALL  [SMOL_SMALL]  79.25,42.67 0 bottom
U$61  [SM�L_NFC#RFID_TAG0]  83.19,37.34 90 top
U$62  [SM�L_NFC#RFID_TAG0]  81.53,27.18 270 bottom
U$63  [#I�C#0]  77.15,18.99 270 bottom
U$64  SPARKX-LOGO3  [SPARKX-SMALL]  90.42,16.38 0 top
U$65  SPARKX-LOGO3  [SPARKX-SMALL]  90.42,27.18 270 bottom
U$66  [IN0]  90.42,41.34 0 bottom
U$67  [OUT0]  90.42,11.43 0 top
U$68  SMOL_LOGOSMALL  [SMOL_SMALL]  90.42,13.27 0 top
U$69  SMOL_LOGOSMALL  [SMOL_SMALL]  90.42,42.67 0 bottom
U$70  [SM�L_NFC#RFID_TAG0]  94.36,37.34 90 top
U$71  [SM�L_NFC#RFID_TAG0]  92.71,27.18 270 bottom
U$72  [#I�C#0]  88.33,18.99 270 bottom
U$73  SPARKX-LOGO3  [SPARKX-SMALL]  101.6,16.38 0 top
U$74  SPARKX-LOGO3  [SPARKX-SMALL]  101.6,27.18 270 bottom
U$75  [IN0]  101.6,41.34 0 bottom
U$76  [OUT0]  101.6,11.43 0 top
U$77  SMOL_LOGOSMALL  [SMOL_SMALL]  101.6,13.27 0 top
U$78  SMOL_LOGOSMALL  [SMOL_SMALL]  101.6,42.67 0 bottom
U$79  [SM�L_NFC#RFID_TAG0]  105.54,37.34 90 top
U$80  [SM�L_NFC#RFID_TAG0]  103.89,27.18 270 bottom
U$81  [#I�C#0]  99.5,18.99 270 bottom
U$82  SPARKX-LOGO3  [SPARKX-SMALL]  112.78,16.38 0 top
U$83  SPARKX-LOGO3  [SPARKX-SMALL]  112.78,27.18 270 bottom
U$84  [IN0]  112.78,41.34 0 bottom
U$85  [OUT0]  112.78,11.43 0 top
U$86  SMOL_LOGOSMALL  [SMOL_SMALL]  112.78,13.27 0 top
U$87  SMOL_LOGOSMALL  [SMOL_SMALL]  112.78,42.67 0 bottom
U$88  [SM�L_NFC#RFID_TAG0]  116.71,37.34 90 top
U$89  [SM�L_NFC#RFID_TAG0]  115.06,27.18 270 bottom
U$90  [#I�C#0]  110.68,18.99 270 bottom